# Allegro board SF2-MC-STARTERKIT_REVB_14-0761_PCB_1017.brd
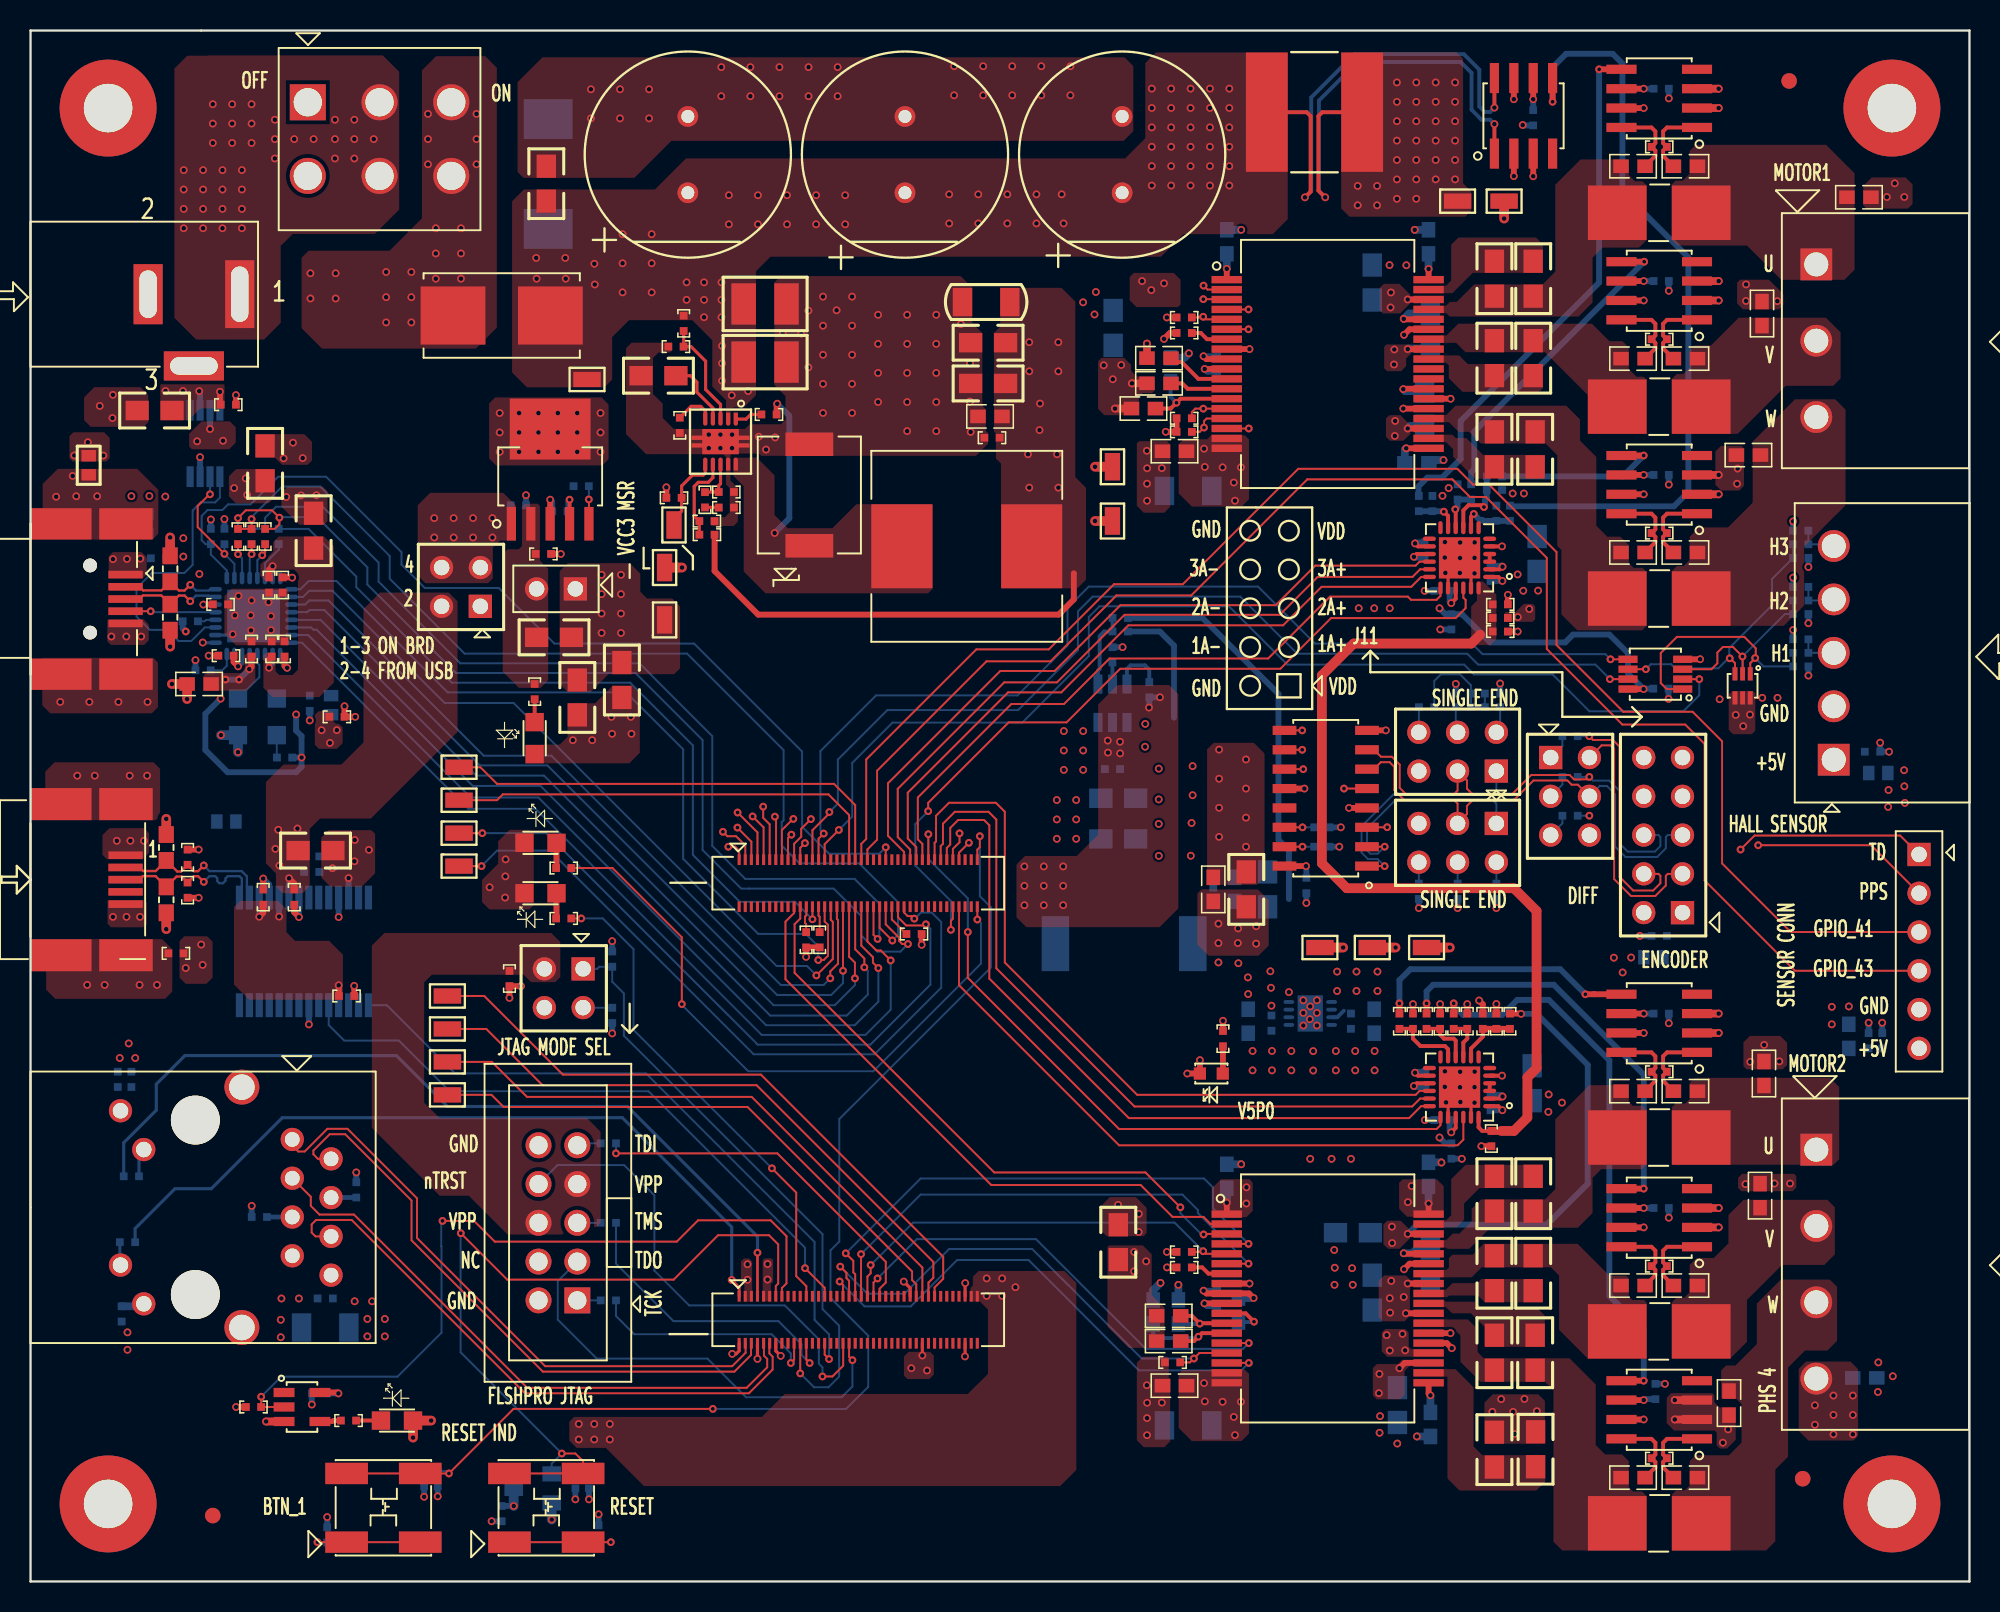
[diagram p0: board, top side]
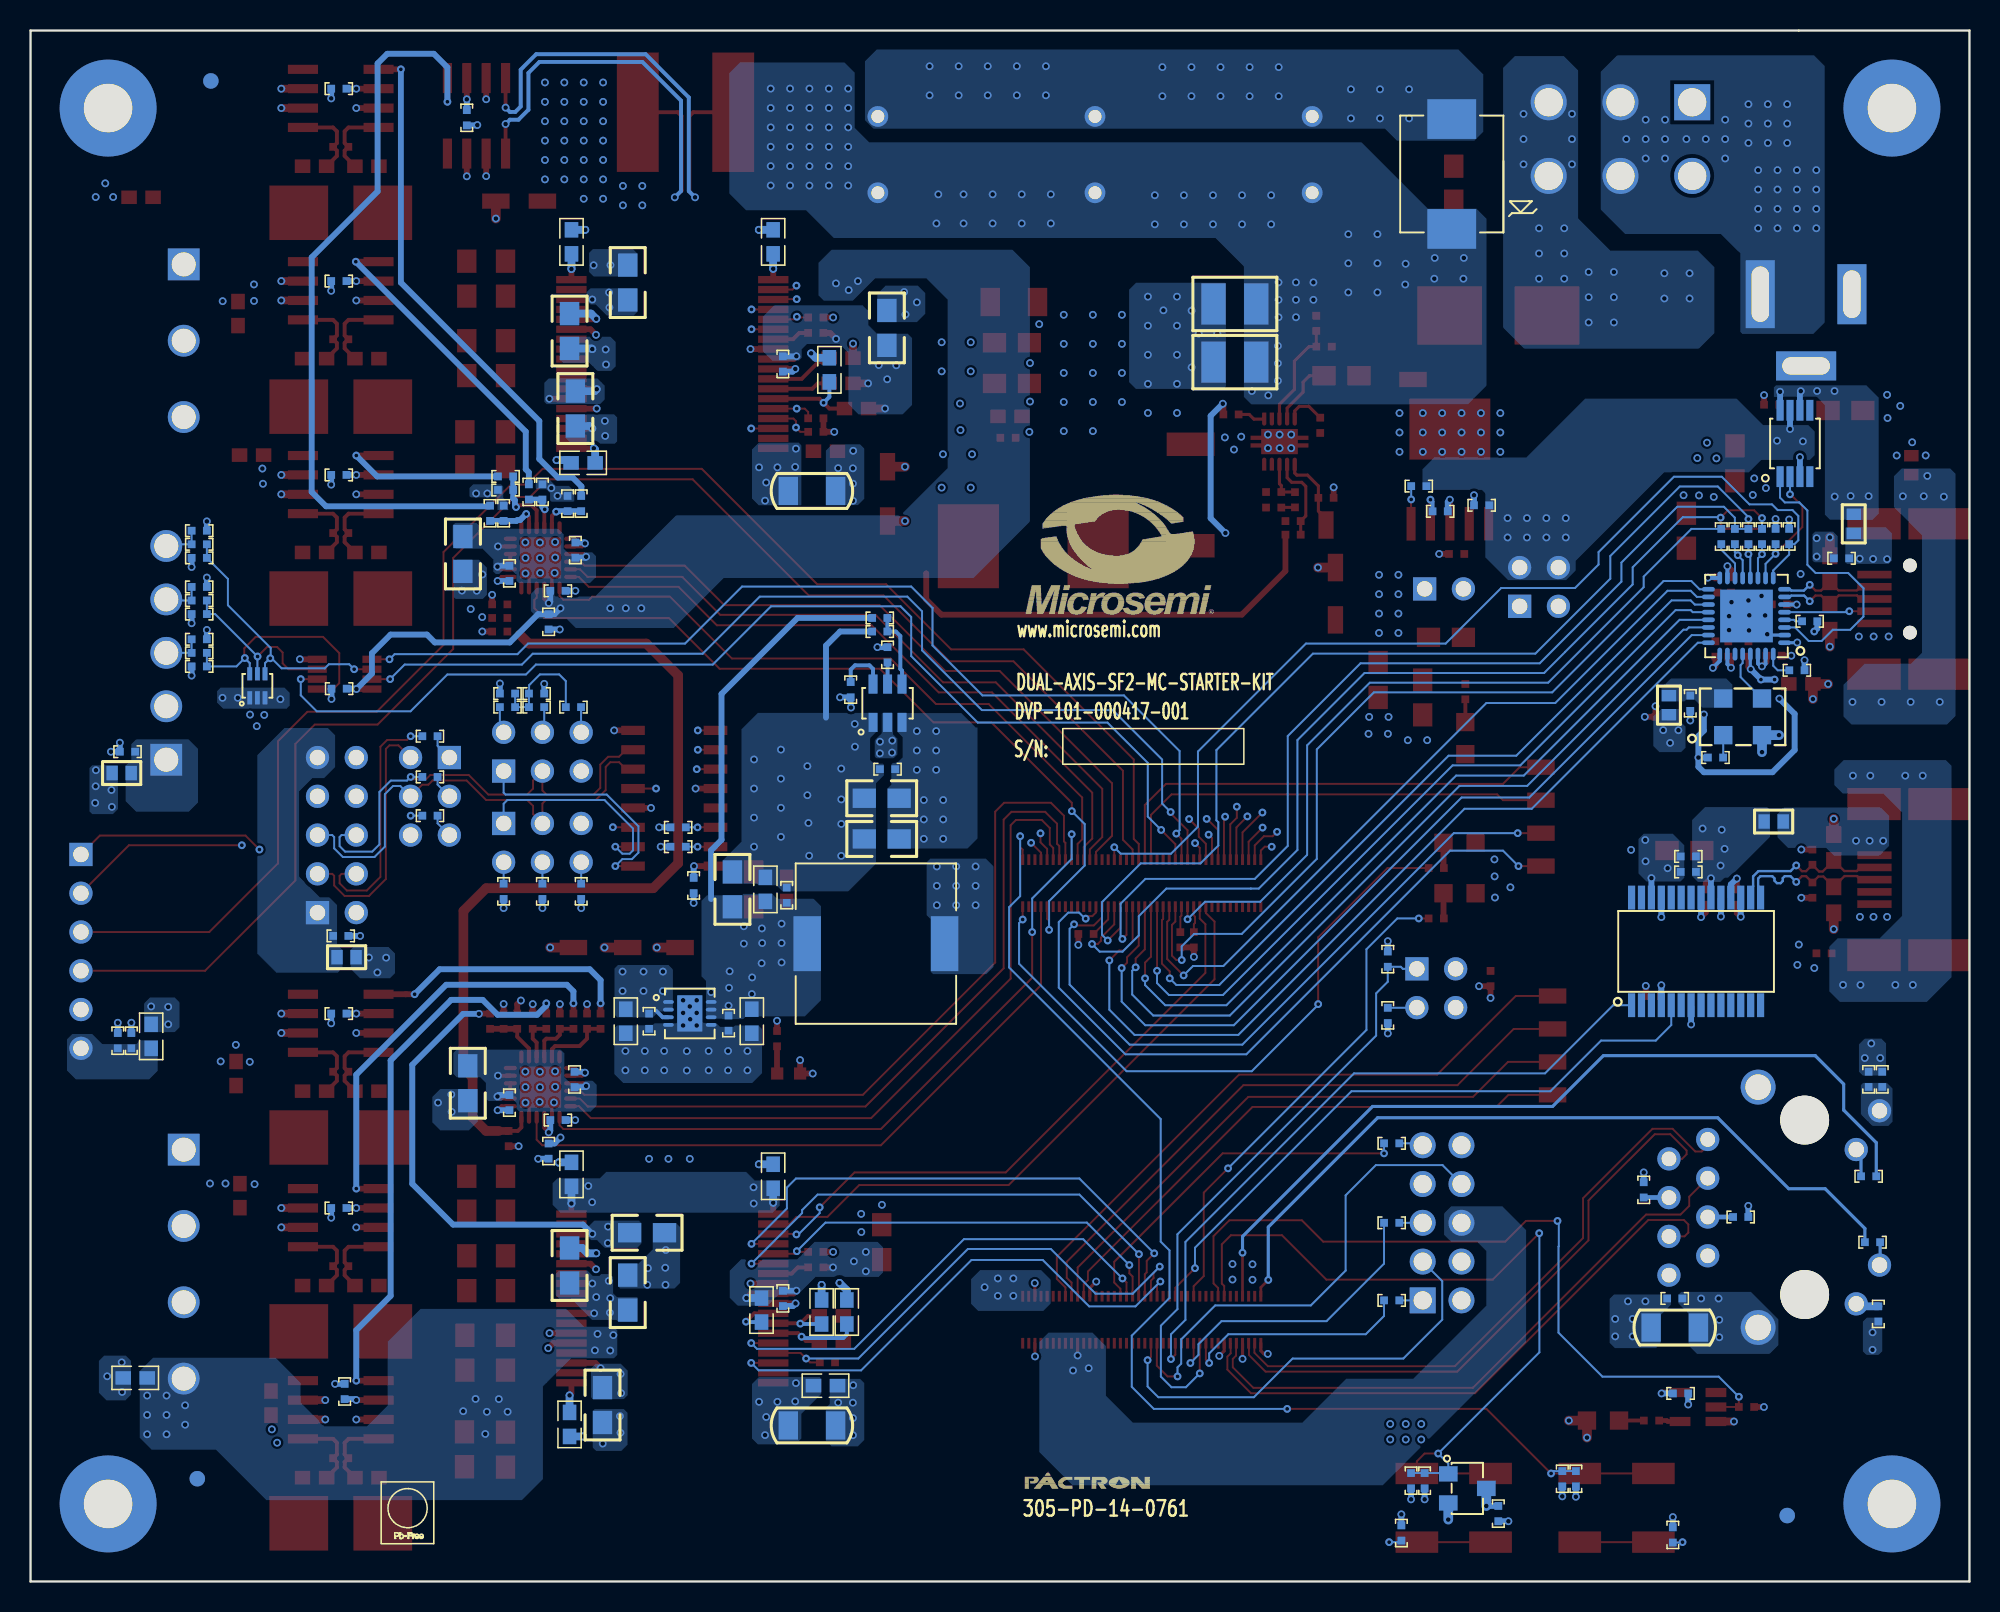
[diagram p1: board, bottom side, seen from below]

Outline 127 x 101.6 mm; copper layers: TOP, GND1, SIGNAL, POWER, GND2, BOTTOM. Coordinates in mm from the lower left corner of the outline.
Outline path: 0,101.6 127,101.6 127,0 0,0 0,101.6

## Design rules (mm)
net group DIFFPAIR0: nets USB_OTG_N USB_OTG_P
net group DIFFPAIR1: nets USB_N USB_P
net group DIFFPAIR2: nets TD_N TD_P
net group DIFFPAIR3: nets RD_N RD_P
net group DIFFPAIR4: nets DRV1_SENSE_UM DRV1_SENSE_UP
net group DIFFPAIR5: nets DRV1_SENSE_VM DRV1_SENSE_VP
net group DIFFPAIR6: nets DRV1_SENSE_WM DRV1_SENSE_WP
net group DIFFPAIR7: nets DRV2_SENSE_UM DRV2_SENSE_UP
net group DIFFPAIR8: nets DRV2_SENSE_VM DRV2_SENSE_VP
net group DIFFPAIR9: nets DRV2_SENSE_WM DRV2_SENSE_WP
net group DIFFPAIR10: nets N16778669 N16779373
net group DIFFPAIR11: nets N16778667 N16778717
net group DIFFPAIR12: nets N16778665 N16779236
nets with their own width: min track width 0.203; nets GND V2P5 VJTAG_VPP
nets with their own width: min track width 0.254; nets AGND1 AGND2 AGND_ADC1 AGND_ADC2 C_GND N01112 N04540 N04995 N16967791 N16971446 N16971530 N16971682 V3P3 V5P0 V12P0 VCC1V8 VCC3 VCC3V3OUT VCC5 VCCUSB VIN_SUPPLY VS_ALL VS_MOTOR

## Placement (name value [footprint] x y rotation side)
C2  0.1uF/25V  [C0402]  48.37 76.45 0 top
C3  0.1uF/25V  [C0402]  62.97 74.92 0 top
C4  1uF/25V  [C0603]  62.85 76.32 180 top
C5  4.7uF/25V  [C0805]  62.72 78.48 180 top
C6  10uF/25V  [C0805]  62.72 81.15 180 top
C7  2.2uF_100V  [C1210]  48.12 83.69 180 bottom
C8  2.2uF_100V  [C1210]  48.12 83.69 180 top
C9  2.2uF_100V  [C1210]  48.12 79.88 180 top
C10  2.2uF_100V  [C1210]  48.12 79.88 180 bottom
C11  47uF_25V  [C1206]  62.59 83.81 0 top
C12  0.01uF_100V  [C0805]  41.13 78.99 0 top
C13  5.6pF_25V  [C0402]  45.58 71.37 180 top
C14  2700pF_50V  [C0402]  45.58 70.35 180 top
C15  10uF/25V  [C0805]  71.25 51.31 0 bottom
C16  10uF/25V  [C0805]  71.25 48.64 0 bottom
C17  0.1uF/25V  [C0402]  70.87 53.21 180 bottom
C18  10uF/16V  [C0603]  78.87 45.34 270 bottom
C19  0.1uF/25V  [C0402]  73.28 58.42 270 bottom
C20  22uF/16V  [C0805]  79.63 45.34 90 top
C21  22uF/16V  [C0805]  81.03 45.34 90 bottom
C22  10uF/16V  [C0603]  77.47 45.34 270 top
C23  0.1uF/25V  [C0402]  77.47 44.96 270 bottom
C24  10uF/16V  [C0603]  79.76 36.7 90 bottom
C25  0.1uF/16V  [C0402]  81.28 36.58 90 bottom
C26  10uF/16V  [C0603]  88.01 36.7 90 bottom
C27  0.1uF/16V  [C0402]  86.49 36.7 90 bottom
C28  330uF/63V  [12P5MM_THT_EEU]  43.05 93.47 180 top
C29  330uF/63V  [12P5MM_THT_EEU]  57.28 93.47 180 top
C30  47uF_25V  [C1206]  75.82 71.44 0 bottom
C31  330uF/63V  [12P5MM_THT_EEU]  71.5 93.47 180 top
C32  0.01uF_100V  [C0805]  33.78 91.57 270 top
C34  0.1uF/100V  [C0805]  87.88 85.09 90 bottom
C35  0.1uF/100V  [C0805]  95.89 85.34 270 top
C36  0.1uF/100V  [C0805]  98.42 85.34 270 top
C37  1uF/25V  [C0603]  74.93 74.04 0 top
C39  470pF/100V  [C0603]  112.52 73.79 0 top
C40  470pF/100V  [C0603]  113.41 83.06 270 top
C41  470pF/100V  [C0603]  119.76 90.68 180 top
C42  0.1uF/100V  [C0805]  91.69 81.91 90 bottom
C43  0.1uF/16V  [C0402]  77.72 79.76 270 bottom
C44  0.1uF/100V  [C0805]  95.89 80.14 90 top
C45  0.1uF/100V  [C0805]  98.42 80.14 90 top
C46  1uF/25V  [C0603]  90.81 73.28 0 bottom
C47  0.1uF/100V  [C0805]  91.31 76.83 90 bottom
C48  0.1uF/100V  [C0805]  95.89 74.17 90 top
C49  0.1uF/100V  [C0805]  98.55 74.17 90 top
C50  1uF/25V  [C0603]  74.93 12.83 0 bottom
C51  47uF_25V  [C1206]  75.82 10.22 0 bottom
C56  0.1uF/100V  [C0805]  86.62 22.84 180 bottom
C57  0.1uF/100V  [C0805]  95.89 25.4 270 top
C58  0.1uF/100V  [C0805]  98.42 25.4 270 top
C59  1uF/25V  [C0603]  91.57 26.67 270 bottom
C60  1uF/25V  [C0603]  78.36 26.54 270 bottom
C61  470pF/100V  [C0603]  111.25 11.68 90 top
C62  470pF/100V  [C0603]  113.28 25.27 270 top
C63  470pF/100V  [C0603]  113.54 33.27 270 top
C64  0.1uF/16V  [C0402]  77.72 18.54 270 bottom
C65  0.1uF/100V  [C0805]  91.69 20.7 90 bottom
C66  0.1uF/100V  [C0805]  95.89 20.19 90 top
C67  0.1uF/100V  [C0805]  98.42 20.19 90 top
C68  1uF/25V  [C0603]  91.69 10.29 90 bottom
C69  0.1uF/100V  [C0805]  89.53 11.56 270 bottom
C70  0.1uF/100V  [C0805]  95.89 14.99 270 top
C71  0.1uF/100V  [C0805]  98.55 14.99 270 top
C72  0.1uF/16V  [C0402]  98.42 95.88 90 bottom
C73  2.2uF/16V  [C0402]  91.31 67.56 90 bottom
C74  0.1uF/16V  [C0402]  106.81 97.79 180 bottom
C75  0.1uF/16V  [C0402]  95.63 66.04 270 bottom
C76  0.1uF/16V  [C0402]  93.07 62.87 90 bottom
C77  1uF/16V  [C0402]  92.46 64.9 180 bottom
C78  0.1uF/16V  [C0402]  91.37 32.89 90 bottom
C79  0.1uF/16V  [C0402]  106.81 85.19 180 bottom
C80  2.2uF/16V  [C0402]  95.63 31.37 270 bottom
C81  0.1uF/16V  [C0402]  106.81 72.49 180 bottom
C82  0.1uF/16V  [C0402]  92.46 30.23 0 bottom
C83  100nF/50V  [C0402]  95.12 36.7 90 top
C84  1uF/16V  [C0402]  93.07 28.19 270 bottom
C85  100nF/50V  [C0402]  106.81 37.2 0 bottom
C86  1uF/16V  [C0402]  121.29 35.42 270 bottom
C90  100nF/50V  [C0402]  106.81 24.47 0 bottom
C92  100nF/50V  [C0402]  106.43 12.45 90 bottom
C94  100pF/50V  [C0402]  120.65 54.36 180 bottom
C96  100pF/50V  [C0402]  115.95 59.94 180 bottom
C97  100pF/50V  [C0402]  115.95 63.37 180 bottom
C98  100pF/50V  [C0402]  115.95 67.06 180 bottom
C99  0.1uF/25V  [C0402]  106.79 58.49 180 bottom
C105  0.1uF/25V  [C0402]  106.68 42.29 180 bottom
C108  100nF/50V  [C0402]  83.57 45.59 90 bottom
C109  0.1uF/16V  [C0402]  20.7 38.35 0 top
C110  0.01uF/25V  [C0402]  15.24 44.83 90 top
C111  0.01uF/25V  [C0402]  17.27 44.83 270 top
C113  22uF/16V  [C0805]  18.67 47.88 0 top
C114  0.1uF/16V  [C0402]  18.41 47.5 0 bottom
C115  0.1uF/16V  [C0402]  21.34 25.65 270 bottom
C116  47pF  [C0402]  10.29 47.45 90 top
C117  47pF  [C0402]  10.29 45.29 270 top
C118  0.1uF/16V  [C0402]  14.99 23.88 0 bottom
C119  0.01uF/25V  [C0402]  9.53 41.15 0 top
C120  0.1uF/16V  [C0402]  5.97 17.53 270 bottom
C121  0.1uF/16V  [C0402]  5.71 32.89 90 bottom
C122  0.1uF/16V  [C0402]  6.6 32.89 90 bottom
C123  1000pF/50V  [C0402]  19.3 18.54 0 bottom
C124  0.1uF/16V  [C0402]  8.38 67.03 0 bottom
C125  0.1uF/16V  [C0402]  12.95 77.09 0 top
C126  22uF/16V  [C0805]  8.13 76.71 180 top
C127  10uF/16V  [C0805]  15.36 73.25 90 top
C128  0.1uF/16V  [C0402]  16.64 61.09 90 top
C129  0.1uF/16V  [C0402]  12.45 64.01 0 top
C130  0.1uF/16V  [C0402]  16.51 65.28 270 top
C131  0.1uF/16V  [C0402]  12.8 60.65 180 top
C132  10uF/16V  [C0805]  18.54 68.83 90 top
C133  0.1uF/16V  [C0402]  15.8 61.09 90 top
C134  0.1uF/16V  [C0402]  15.62 65.28 270 top
C135  4.7uF/16V  [C0603]  11.04 58.79 180 top
C136  0.1uF/16V  [C0402]  14.48 61.09 90 top
C137  0.1uF/16V  [C0402]  20.07 56.64 0 top
C138  0.1uF/16V  [C0402]  18.29 57.53 270 bottom
C139  0.1uF/16V  [C0402]  31.95 70.5 0 bottom
C140  22uF/16V  [C0805]  38.73 59.05 270 top
C141  22uF/16V  [C0805]  35.81 57.91 270 top
C142  0.01uF/25V  [C0402]  34.67 70.1 180 bottom
C143  1uF/16V  [C0402]  33.59 67.31 180 top
C144  0.1uF/16V_NL  [C0402]  18.92 12.32 180 bottom
C145  0.01uF/25V  [C0402]  36.58 6.6 270 bottom
C146  0.1uF/16V_NL  [C0402]  30.86 4.45 270 bottom
C147  0.01uF/25V  [C0402]  26.67 6.73 270 bottom
C148  0.1uF/25V  [C0402]  120.4 35.42 270 bottom
C149  100nF/50V  [C0402]  95.68 29.01 270 top
C150  100nF/50V  [C0402]  96.27 62.23 0 top
C151  0.1uF/16V  [C0402]  18.41 46.48 0 bottom
C152  1uF/25V  [C0603]  78.36 87.76 90 bottom
C153  1uF/25V  [C0603]  91.57 87.76 90 bottom
C154  470pF/100V  [C0603]  120.14 13.34 180 bottom
C155  0.1uF/100V  [C0805]  87.88 18.92 90 bottom
C156  1uF/25V  [C0603]  74.93 12.83 0 top
C157  0.1uF/100V  [C0805]  95.89 8.64 90 top
C158  0.1uF/100V  [C0805]  98.58 8.66 90 top
C160  0.01uF/25V  [C0402]  95.89 71.5 0 bottom
C161  0.01uF/25V  [C0402]  91.82 70.61 90 bottom
C162  0.01uF/25V  [C0402]  96.01 69.98 90 bottom
C163  0.01uF/25V  [C0402]  93.47 71.37 90 bottom
C164  0.01uF/25V  [C0402]  90.55 36.7 90 top
C165  0.01uF/25V  [C0402]  94.11 36.7 90 top
C166  0.01uF/25V  [C0402]  92.33 36.7 90 top
D1  SMBJ51A  [DO-214AB]  33.91 92.2 270 bottom
D3  STPS5L60S  [DO-214AB_STPS5]  51.01 71.17 270 top
D4  -  [BAT54VV]  112.14 58.67 180 top
D6  -  [BAT54VV]  112.14 58.67 180 bottom
D8  PGB1010603MR  [D0603]  8.89 44.65 90 top
D9  PGB1010603MR  [D0603]  8.89 48.08 270 top
D10  PGB1010603MR  [D0603]  9.14 63.16 90 top
D11  PGB1010603MR  [D0603]  9.14 66.34 270 top
D12  LED GREEN  [HSMG-C170]  33.02 55.25 270 top
D13  LED GREEN  [HSMG-C170]  33.4 48.39 180 top
D14  LED GREEN  [HSMG-C170]  33.4 45.09 180 top
D16  LED GREEN  [HSMG-C170]  24 10.54 180 top
F1  8A/ Fast  [FUSE_SMD_HLDR_8A_0154008]  30.86 82.93 0 top
GND1  TPAD  [TP_0603]  96.52 90.42 0 top
GND2  TPAD  [TP_0603]  70.87 73.02 270 top
GND3  TPAD  [TP_0603]  87.88 41.53 0 top
GND4  TPAD  [TP_0603]  41.53 66.42 90 top
GPIO1  TPAD  [TP_0603]  27.3 31.88 180 top
GPIO2  TPAD  [TP_0603]  27.3 34.04 180 top
GPIO3  TPAD  [TP_0603]  27.3 36.2 180 top
GPIO4  TPAD  [TP_0603]  27.3 38.35 180 top
GPIO5  TPAD  [TP_0603]  28.07 51.18 0 top
GPIO6  TPAD  [TP_0603]  28.07 53.34 0 top
GPIO7  TPAD  [TP_0603]  28.07 49.02 0 top
GPIO8  TPAD  [TP_0603]  28.07 46.86 0 top
J2  -  [RIA330-03]  116.97 81.28 90 top
J3  -  [RIA330-04]  116.97 28.29 90 top
J4  -  [RIA182-05]  118.11 60.83 90 top
J7  HDR2X3  [HDR2X3_100MIL]  96.01 49.66 180 top
J8  HDR2X3  [HDR2X3_100MIL]  99.57 53.98 270 top
J11  10PIN JUMPER  [HDR2X5]  108.2 43.81 90 top
J12  DC JACK  [PJ-202AH_JACK]  0 84.33 180 top
J13  HDR2X3  [HDR2X3_100MIL_1]  96.01 55.63 180 top
J15  -  [J00-0045NL]  0 24.51 90 top
J16  -  [54819-0572]  0 45.97 0 top
J17  -  [67803-8020]  0 64.36 270 top
J19  HEADER_1x2_100mil  [HEADER_1X2_100MIL]  34.42 65.02 180 top
J20  HEADER 2X5  [HDR_2X5_BOX]  34.54 23.5 90 top
J22  -  [HDR2X2_100MIL]  36.2 40.13 180 top
J23  -  [HDR2X2_100MIL]  29.46 63.88 90 top
J25  CON6  [HDR6X1]  123.7 41.27 270 top
L1  33uH  [12X12MM_MSS1260]  61.32 67.81 0 top
L2  4.7uH  [10X10MM_SRU1048]  71.63 41.78 0 bottom
L9  600R@100MHz/1A  [FB0603]  121.03 52.96 180 bottom
L13  600R@100MHz/1A  [FB0603]  106.3 40.89 0 bottom
L14  BLM18PG121SN1D  [FB0603]  12.83 49.78 180 bottom
L15  BLM18PG121SN1D  [FB0603]  7.58 69.29 270 bottom
L16  BLM18PG121SN1D  [FB0603]  3.81 73.12 270 top
L17  BLM18PG121SN1D  [FB0603]  19.69 57.4 90 bottom
LED1  GRN  [LED0603]  77.34 33.27 180 top
NOREF  -  [unnamed]  11.94 4.32 0 top
NOREF#2  -  [unnamed#2]  5.08 96.52 0 top
NOREF#3  -  [#2]  127 101.6 0 top
NOREF#4  -  [unnamed#2]  121.92 96.52 0 top
NOREF#5  -  [#2]  5.08 5.08 0 top
NOREF#6  -  [#2]  5.08 5.08 0 top
NOREF#7  -  [unnamed#2]  121.92 5.08 0 top
NOREF#8  -  [#2]  127 0 0 top
NOREF#9  -  [#2]  127 101.6 0 top
NOREF#10  -  [unnamed]  5.08 5.08 0 top
NOREF#11  -  [#2]  0 0 0 top
NOREF#12  -  [unnamed]  115.19 98.3 0 top
NOREF#13  -  [#2]  127 0 0 top
NOREF#14  -  [unnamed]  116.08 6.73 0 top
NOREF#15  -  [unnamed]  116.08 6.73 180 bottom
NOREF#16  -  [unnamed]  115.19 98.3 180 bottom
NOREF#17  -  [unnamed]  11.94 4.32 180 bottom
P1  DF40HC(4.0)-80DS-0.4V  [DF40HC-4_0-80DS-0_4V]  54.22 17.14 0 top
P2  DF40HC(4.0)-80DS-0.4V  [DF40HC-4_0-80DS-0_4V]  54.22 45.74 0 top
R2  0.020R/4W  [R2728_WIDE]  84.1 96.25 180 top
R5  332K  [R0402]  42.78 82.42 270 top
R6  140K  [R0402]  44.31 68.57 180 top
R7  56.2K  [R0402]  42.27 80.89 180 top
R8  165K  [R0402]  42.53 75.74 270 top
R9  10K  [R0402]  44.31 69.46 0 top
R10  76.8K  [R0402]  44.18 70.86 270 top
R12  10K  [R0402]  70.87 60.71 90 bottom
R13  274K_1%  [R0402]  71.37 63.12 180 bottom
R14  49.9K  [R0402]  71.37 62.23 0 bottom
R17  0R/0603  [R0603]  104.97 92.71 180 top
R18  10K  [R0402]  75.56 82.8 180 top
R19  10K  [R0402]  75.56 76.2 180 top
R20  10K  [R0402]  75.56 75.31 180 top
R21  0.020R/2W  [R3624]  106.68 89.66 0 top
R22  0R/0603  [R0603]  108.39 92.71 0 top
R23  0R  [R0603]  72.9 76.83 180 top
R24  0R_NL  [R0603]  74.68 79.38 90 bottom
R25  0R  [R0603]  73.91 78.49 180 top
R26  0R  [R0603]  73.91 80.14 180 top
R27  43K_1%  [R0402]  75.56 81.79 180 top
R28  0R/0603  [R0603]  108.39 80.11 0 top
R29  0.020R/2W  [R3624]  106.68 76.96 180 top
R30  0R/0603  [R0603]  104.97 80.11 180 top
R31  1R_0.25W  [R0805]  70.91 82.12 270 bottom
R32  0R/0603  [R0603]  104.97 67.41 180 top
R33  0.020R/2W  [R3624]  106.68 64.39 0 top
R34  0R/0603  [R0603]  108.39 67.41 0 top
R37  0R/0603  [R0603]  104.97 32.12 180 top
R39  10K  [R0402]  75.56 21.59 180 top
R40  10K  [R0402]  74.8 14.35 180 top
R41  0.020R/2W  [R3624]  106.68 29.08 0 top
R42  0R/0603  [R0603]  108.39 32.12 0 top
R43  0R  [R0603]  74.55 15.75 180 top
R44  0R_NL  [R0603]  73.53 17.65 90 bottom
R46  0R  [R0603]  74.55 17.4 180 top
R47  43K_1%  [R0402]  75.56 20.57 180 top
R48  0R/0603  [R0603]  104.97 19.39 180 top
R49  0.020R/2W  [R3624]  106.68 16.38 180 top
R50  0R/0603  [R0603]  108.39 19.39 0 top
R51  1R_0.25W  [R0805]  71.25 22.23 270 top
R52  0R/0603  [R0603]  104.97 6.8 180 top
R53  0.020R/2W  [R3624]  106.68 3.81 0 top
R54  0R/0603  [R0603]  108.39 6.8 0 top
R55  1R_0.25W  [R0805]  98.68 67.31 270 bottom
R56  1K/1%  [R0402]  106.68 93.98 180 top
R58  1R_0.25W  [R0805]  98.36 32.64 270 bottom
R61  1K/1%  [R0402]  106.68 81.38 180 top
R64  1K/1%  [R0402]  106.68 68.68 180 top
R66  15K/1%  [R0402]  96.9 36.7 270 top
R67  1K/1%  [R0402]  96.01 36.7 270 top
R69  1K/1%  [R0402]  106.68 33.39 180 top
R74  1K/1%  [R0402]  106.68 20.66 180 top
R77  1K/1%  [R0402]  106.68 8.07 180 top
R79  4.7K  [R0402]  115.95 61.72 180 bottom
R80  4.7K  [R0402]  115.95 65.15 180 bottom
R81  4.7K  [R0402]  115.95 68.83 180 bottom
R85  220R/1%  [RC0402]  115.95 60.83 180 bottom
R86  220R/1%  [RC0402]  115.95 64.26 180 bottom
R89  220R/1%  [RC0402]  115.95 67.94 180 bottom
R91  470R  [RC0402]  96.01 45.21 270 bottom
R92  470R  [RC0402]  93.47 45.21 270 bottom
R93  470R  [RC0402]  90.93 45.21 270 bottom
R94  120R  [RC0402]  100.84 55.37 0 bottom
R95  120R  [RC0402]  100.84 52.7 0 bottom
R96  120R  [RC0402]  100.84 50.16 0 bottom
R103  47k/1%  [RC0402]  95.76 57.28 0 bottom
R104  47k/1%  [RC0402]  93.85 57.28 180 bottom
R105  47k/1%  [RC0402]  91.44 57.28 180 bottom
R111  3.3K/1%  [RC0402]  93.85 58.17 0 bottom
R112  2.2K/1%  [RC0402]  95.76 58.17 0 bottom
R113  270R  [R0402]  6.6 26.54 0 bottom
R114  270R  [R0402]  6.35 22.23 180 bottom
R115  5.1Meg 0.25W  [R1206]  19.3 16.64 0 bottom
R116  10K  [R0402]  12.7 68.45 270 bottom
R117  820R  [R0402]  10.46 62.9 0 bottom
R118  0R_NL  [R0402]  13.59 68.45 90 bottom
R119  0R  [R0402]  15.37 68.45 90 top
R120  0R_NL  [R0402]  14.48 68.45 90 top
R121  0R  [R0402]  13.59 68.45 90 top
R122  12K  [R0402]  11.3 59.69 0 bottom
R123  0R_NL  [R0402]  15.37 68.45 90 bottom
R124  0R  [R0402]  14.48 68.45 90 bottom
R125  33R  [R0402]  16.26 68.45 90 bottom
R126  10K_NL  [R0402]  11.81 68.45 90 bottom
R127  1K/1%_NL  [R0402]  16.64 53.98 0 bottom
R128  0.16R  [R0805]  34.29 61.85 180 top
R129  10K  [R0402]  36.07 71.75 180 bottom
R130  270R  [R0402]  33.02 58.29 90 top
R131  270R  [R0402]  34.92 46.74 0 top
R132  270R  [R0402]  34.92 43.43 0 top
R134  10K  [R0402]  35.69 6.6 270 bottom
R135  270R  [R0402]  20.83 10.54 180 top
R136  10K_NL  [R0402]  14.61 11.43 0 top
R137  100R  [R0402]  37.21 3.17 270 bottom
R138  100R  [R0402]  19.43 3.05 270 bottom
R139  0R  [R0402]  50.8 42.04 90 top
R140  0R  [R0402]  51.69 42.04 90 top
R141  0R  [R0402]  57.87 42.42 180 top
R142  33R  [R0402]  37.85 18.42 0 bottom
R143  33R  [R0402]  37.85 23.5 0 bottom
R145  33R  [R0402]  37.85 28.7 0 bottom
R149  10K  [R0402]  38.1 40.77 270 bottom
R153  1K/1%  [R0402]  38.1 37.08 270 bottom
R154  10K_NL  [R0402]  31.37 39.5 270 top
R155  1K/1%  [R0402]  96.27 63.12 180 top
R156  1K/1%  [R0402]  96.27 64.01 0 top
R157  10K  [R0402]  25.78 6.73 270 bottom
R158  100K  [R0402]  42.15 70.99 0 top
R159  470R  [RC0402]  78.11 35.56 90 top
R160  0R/0603  [R0603]  119.1 35.71 270 bottom
R162  0R  [R0603]  79.12 17.78 90 bottom
R165  0R_NL  [R0603]  75.18 17.65 270 bottom
R166  0R  [R0402]  84.58 49.4 180 bottom
R167  0R  [R0402]  84.58 48.13 180 bottom
R168  1K/1%  [R0402]  90.93 70.61 90 bottom
R176  1K/1%  [R0402]  94.36 71.37 90 bottom
R177  1K/1%  [R0402]  95.89 72.39 0 bottom
R178  1K/1%  [R0402]  96.9 69.98 90 bottom
R179  1K/1%  [R0402]  89.66 36.7 270 top
R180  1K/1%  [R0402]  93.22 36.7 270 top
R181  1K/1%  [R0402]  91.44 36.7 270 top
SW1  TL3301AF160QJ  [TL3301_SPST]  33.78 4.83 0 top
SW2  TL3301AF160QJ  [TL3301_SPST]  23.11 4.83 0 top
SW3  SW_DPDT  [SW_DPDT_1201]  22.86 94.49 270 top
U1  TPS54160QDRCRQ1  [10SON_TPS54160Q]  45.19 74.67 0 top
U2  TPS562200  [SOT23-6_TPS562200]  70.87 57.53 180 bottom
U3  LT1965EDD-3.3#PBF  [8DFN_LT1965]  83.82 37.21 270 bottom
U4  DRV8332DKDR  [36HSSOP_DRV8332]  84.96 79.76 270 top
U5  DRV8432DKDR  [36HSSOP_DRV8332]  84.96 18.54 270 top
U6  AD8206YRZ  [8SOIC_AD8206YRZ]  97.79 96.01 0 top
U7  AD8206YRZ  [8SOIC_AD8206YRZ]  106.68 97.15 90 top
U9  ADS7950SBRGER  [24-QFN_ADS7950]  93.6 67.06 180 top
U11  AD8206YRZ  [8SOIC_AD8206YRZ]  106.68 84.55 90 top
U12  ADS7950SBRGER  [24-QFN_ADS7950]  93.6 32.38 180 top
U13  AD8206YRZ  [8SOIC_AD8206YRZ]  106.68 71.85 90 top
U15  AD8206YRZ  [8SOIC_AD8206YRZ]  106.68 36.57 90 top
U19  AD8206YRZ  [8SOIC_AD8206YRZ]  106.68 23.83 90 top
U21  AD8206YRZ  [8SOIC_AD8206YRZ]  106.68 11.25 90 top
U23  74LVC3G17  [74LVC3G17_8TSSOP]  106.43 59.44 90 top
U25  -  [AM26LV32ID]  84.84 51.31 90 top
U27  -  [FT232RL]  17.91 41.27 90 bottom
U28  -  [MIC2025-1YMM]  11.43 74.55 180 bottom
U29  -  [USB3300-EZK]  14.61 63.25 0 bottom
U30  -  [TPS73733DCQ]  34.04 72.39 0 top
U31  74LX1G07STR  [SOT23-5_74LX1G07STR]  17.78 11.43 270 top
U32  RT9818C-29GV_NL  [RT9818C-29GV_SOT23-3]  32.89 6.1 270 bottom
UNK12V_PG  TPAD  [TP_0603]  42.15 69.21 90 top
V3P3  TPAD  [TP_0603]  91.44 41.53 0 top
V5P0  TPAD  [TP_0603]  84.45 41.53 0 top
V12P0  TPAD  [TP_0603]  70.87 69.47 270 top
VCC3  TPAD  [TP_0603]  41.53 62.99 90 top
VS_ALL  TPAD  [TP_0603]  36.45 78.74 0 top
VS_MOTOR  TPAD  [TP_0603]  93.47 90.42 0 top
Y1  ASFLMB-24.000MHZ-LC-T  [ASFLMB-24MHZ]  14.86 56.64 180 bottom

## Library data of the parts
C2-C4 C6 C15-C17 C19 C23 C37 C46 C50 C59 C60 C68 C99 C105 C148 C152 C153 C156 = Cap
C5 C20 C21 C34-C36 C42 C44 C45 C47-C49 C56-C58 C65-C67 C69-C71 C77 C84 C86 C110 C111 C113 C116 C117 C119 C123 C126 C127 C132 C135 C140-C143 C145 C147 C155 C157 C158 C160-C166 = CAPACITOR NON-POL
C7-C14 C18 C22 C24-C27 C30 C32 C39-C41 C43 C51 C61-C64 C72-C76 C78-C83 C85 C90 C92 C94 C96-C98 C108 C109 C114 C115 C118 C120-C122 C124 C125 C128-C131 C133 C134 C136-C139 C144 C146 C149-C151 C154 = CAP NP
C28 C29 C31 = CAP
D1 = DIODE ZENER
D3 = DIODE SCHOTTKY13
D4 D6 = DIODE SCHOTTKY
D8-D11 = DIODE BI-DIR TRIG_0
D12-D14 D16 LED1 = LED
F1 = FUSEHOLDER_2
GND1-GND4 GPIO1-GPIO8 UNK12V_PG V3P3 V5P0 V12P0 VCC3 VS_ALL VS_MOTOR = TEST POINT_0
J2 = MOTOR_HEADRE
J3 = MOTOR_HEADER_4PIN
J4 = HDR_0
J7 J8 J13 = HDR5X1_4
J11 = HDR_2
J12 = PHONEJACK_1
J15 = J00-0045NL
J16 = 54819-0572
J17 = 67803-8020
J19 = HEADER_1x2_100mil
J20 = HEADER 5X2
J22 J23 = JUMPER-2X2PIN
J25 = CON6
L1 L2 L9 L13-L17 = INDUCTOR
P1 P2 = DF40HC-4_0-80DS-0_4V
R2 R5-R10 R12-R14 R17-R34 R37 R39-R44 R46-R55 R58 R113-R126 R128-R132 R134-R143 R145 R149 R154-R158 R160 R162 R165-R167 = R
R56 R61 R64 R66 R67 R69 R74 R77 R79-R81 R85 R86 R89 R91-R96 R103-R105 R111 R112 R127 R153 R159 R168 R176-R181 = RESISTOR
SW1 SW2 = TL3301AF160QJ
SW3 = SW DPDT
U1 = TPS54160QDRCRQ1
U2 = TPS562200
U3 = LT1965EDD-3.3#PBF
U4 = DRV8332DKDR
U5 = DRV8432DKDR
U6 U7 U11 U13 U15 U19 U21 = AD8206YRZ
U9 U12 = ADS7950SBRGER
U23 = 74LVC3G17
U25 = AM26LV32ID
U27 = FT232RL
U28 = MIC2025-1YMM
U29 = USB3300-EZK
U30 = TPS73733DCQ
U31 = 74LX1G07STR
U32 = RT9818C-29GV
Y1 = ASDMB-24.000MHZ-LC-T

## Footprints (pads in the part's own frame, mm; a bottom-side part is the same pattern mirrored in y, then rotated)
8DFN_LT1965
  oval 0.25x0.7 smd: 1(-0.75,-1.4) 2(-0.25,-1.4) 3(0.25,-1.4) 4(0.75,-1.4) 5(0.75,1.4) 6(0.25,1.4) 7(-0.25,1.4) 8(-0.75,1.4)
  rect 2.38x1.65 smd: 9(0,0)
8SOIC_AD8206YRZ
  rect 0.6x1.97 smd: 1(-1.905,-2.475) 2(-0.635,-2.475) 3(0.635,-2.475) 4(1.905,-2.475) 5(1.905,2.475) 6(0.635,2.475) 7(-0.635,2.475) 8(-1.905,2.475)
10SON_TPS54160Q
  custom 0.28x0.85 smd: 1(1,1.475) 2(0.5,1.475) 3(0,1.475) 4(-0.5,1.475) 5(-1,1.475) 6(-1,-1.475) 7(-0.5,-1.475) 8(0,-1.475) 9(0.5,-1.475) 10(1,-1.475)
  custom 3.8x1.65 smd: 11(0,0)
10X10MM_SRU1048
  rect 1.8x3.6 smd: 1(-4.5,0) 2(4.5,0)
12P5MM_THT_EEU
  round 1.358 hole 0.85: 1(0,2.5) 2(0,-2.5)
12X12MM_MSS1260
  rect 4x5.5 smd: 1(-4.25,0) 2(4.25,0)
24-QFN_ADS7950
  oval 0.85x0.28 smd: 1(-1.975,1.25) 2(-1.975,0.75) 3(-1.975,0.25) 4(-1.975,-0.25) 5(-1.975,-0.75) 6(-1.975,-1.25) 13(1.975,-1.25) 14(1.975,-0.75) 15(1.975,-0.25) 16(1.975,0.25) 17(1.975,0.75) 18(1.975,1.25)
  oval 0.28x0.85 smd: 7(-1.25,-1.975) 8(-0.75,-1.975) 9(-0.25,-1.975) 10(0.25,-1.975) 11(0.75,-1.975) 12(1.25,-1.975) 19(1.25,1.975) 20(0.75,1.975) 21(0.25,1.975) 22(-0.25,1.975) 23(-0.75,1.975) 24(-1.25,1.975)
  rect 2.7x2.7 smd: 25(0,0)
36HSSOP_DRV8332
  rect 0.48x1.99 smd: 1(-5.525,-6.61) 2(-4.875,-6.61) 3(-4.225,-6.61) 4(-3.575,-6.61) 5(-2.925,-6.61) 6(-2.275,-6.61) 7(-1.625,-6.61) 8(-0.975,-6.61) 9(-0.325,-6.61) 10(0.325,-6.61) 11(0.975,-6.61) 12(1.625,-6.61) 13(2.275,-6.61) 14(2.925,-6.61) 15(3.575,-6.61) 16(4.225,-6.61) 17(4.875,-6.61) 18(5.525,-6.61) 19(5.525,6.61) 20(4.875,6.61) 21(4.225,6.61) 22(3.575,6.61) 23(2.925,6.61) 24(2.275,6.61) 25(1.625,6.61) 26(0.975,6.61) 27(0.325,6.61) 28(-0.325,6.61) 29(-0.975,6.61) 30(-1.625,6.61) 31(-2.275,6.61) 32(-2.925,6.61) 33(-3.575,6.61) 34(-4.225,6.61) 35(-4.875,6.61) 36(-5.525,6.61)
74LVC3G17_8TSSOP
  rect 0.48x1.25 smd: 1(-0.975,-1.79) 2(-0.325,-1.79) 3(0.325,-1.79) 4(0.975,-1.79) 5(0.975,1.79) 6(0.325,1.79) 7(-0.325,1.79) 8(-0.975,1.79)
54819-0572
  rect 2.25x0.5 smd: 1(6.225,1.6) 2(6.225,0.8) 3(6.225,0) 4(6.225,-0.8) 5(6.225,-1.6)
  rect 3.5x2.1 smd: 6(6.25,4.95) 7(6.25,-4.95)
  rect 4x2.1 smd: 8(2,4.95) 9(2,-4.95)
67803-8020
  round 0.9 hole 0.9 unplated: (-2.2,3.9) (2.2,3.9)
  rect 0.5x2.25 smd: 1(-1.6,6.225) 2(-0.8,6.225) 3(0,6.225) 4(0.8,6.225) 5(1.6,6.225)
  rect 2.05x3.5 smd: 6(4.925,6.25) 9(-4.925,6.25)
  rect 2.05x4 smd: 7(4.925,2) 8(-4.925,2)
AM26LV32ID
  rect 0.6x1.55 smd: 1(-4.445,-2.7) 2(-3.175,-2.7) 3(-1.905,-2.7) 4(-0.635,-2.7) 5(0.635,-2.7) 6(1.905,-2.7) 7(3.175,-2.7) 8(4.445,-2.7) 9(4.445,2.7) 10(3.175,2.7) 11(1.905,2.7) 12(0.635,2.7) 13(-0.635,2.7) 14(-1.905,2.7) 15(-3.175,2.7) 16(-4.445,2.7)
ASFLMB-24MHZ
  rect 1.2x1.2 smd: 1(-1.27,-1.2) 2(1.27,-1.2) 3(1.27,1.2) 4(-1.27,1.2)
BAT54VV
  rect 0.318x0.86 smd: 1(-0.5,-0.785) 2(0,-0.785) 3(0.5,-0.785) 4(0.5,0.785) 5(0,0.785) 6(-0.5,0.785)
C0402
  rect 0.508x0.508 smd: 1(-0.5,0) 2(0.5,0)
C0603
  rect 1.016x0.889 smd: 1(-0.787,0) 2(0.787,0)
C0805
  rect 1.524x1.27 smd: 1(-1.143,0) 2(1.143,0)
C1206
  rect 1.27x1.854 smd: 1(-1.549,0) 2(1.549,0)
C1210
  rect 1.6x2.7 smd: 1(-1.4,0) 2(1.4,0)
D0603
  rect 1.1x1 smd: 1(-0.85,0) 2(0.85,0)
DF40HC-4_0-80DS-0_4V
  rect 0.2x0.7 smd: 1(-7.8,1.54) 2(-7.8,-1.54) 3(-7.4,1.54) 4(-7.4,-1.54) 5(-7,1.54) 6(-7,-1.54) 7(-6.6,1.54) 8(-6.6,-1.54) 9(-6.2,1.54) 10(-6.2,-1.54) 11(-5.8,1.54) 12(-5.8,-1.54) 13(-5.4,1.54) 14(-5.4,-1.54) 15(-5,1.54) 16(-5,-1.54) 17(-4.6,1.54) 18(-4.6,-1.54) 19(-4.2,1.54) 20(-4.2,-1.54) 21(-3.8,1.54) 22(-3.8,-1.54) 23(-3.4,1.54) 24(-3.4,-1.54) 25(-3,1.54) 26(-3,-1.54) 27(-2.6,1.54) 28(-2.6,-1.54) 29(-2.2,1.54) 30(-2.2,-1.54) 31(-1.8,1.54) 32(-1.8,-1.54) 33(-1.4,1.54) 34(-1.4,-1.54) 35(-1,1.54) 36(-1,-1.54) 37(-0.6,1.54) 38(-0.6,-1.54) 39(-0.2,1.54) 40(-0.2,-1.54) 41(0.2,1.54) 42(0.2,-1.54) 43(0.6,1.54) 44(0.6,-1.54) 45(1,1.54) 46(1,-1.54) 47(1.4,1.54) 48(1.4,-1.54) 49(1.8,1.54) 50(1.8,-1.54) 51(2.2,1.54) 52(2.2,-1.54) 53(2.6,1.54) 54(2.6,-1.54) 55(3,1.54) 56(3,-1.54) 57(3.4,1.54) 58(3.4,-1.54) 59(3.8,1.54) 60(3.8,-1.54) 61(4.2,1.54) 62(4.2,-1.54) 63(4.6,1.54) 64(4.6,-1.54) 65(5,1.54) 66(5,-1.54) 67(5.4,1.54) 68(5.4,-1.54) 69(5.8,1.54) 70(5.8,-1.54) 71(6.2,1.54) 72(6.2,-1.54) 73(6.6,1.54) 74(6.6,-1.54) 75(7,1.54) 76(7,-1.54) 77(7.4,1.54) 78(7.4,-1.54) 79(7.8,1.54) 80(7.8,-1.54)
DO-214AB
  rect 2.6x3.2 smd: 1(-3.6,0) 2(3.6,0)
DO-214AB_STPS5
  rect 1.54x3.14 smd: 1(-3.325,0) 2(3.325,0)
FB0603
  rect 0.75x0.95 smd: 1(-0.625,0) 2(0.625,0)
FT232RL
  rect 1.56x0.47 smd: 1(-3.525,4.225) 2(-3.525,3.575) 3(-3.525,2.925) 4(-3.525,2.275) 5(-3.525,1.625) 6(-3.525,0.975) 7(-3.525,0.325) 8(-3.525,-0.325) 9(-3.525,-0.975) 10(-3.525,-1.625) 11(-3.525,-2.275) 12(-3.525,-2.925) 13(-3.525,-3.575) 14(-3.525,-4.225) 15(3.525,-4.225) 16(3.525,-3.575) 17(3.525,-2.925) 18(3.525,-2.275) 19(3.525,-1.625) 20(3.525,-0.975) 21(3.525,-0.325) 22(3.525,0.325) 23(3.525,0.975) 24(3.525,1.625) 25(3.525,2.275) 26(3.525,2.925) 27(3.525,3.575) 28(3.525,4.225)
FUSE_SMD_HLDR_8A_0154008
  rect 4.242x3.81 smd: 1(-3.188,0) 2(3.188,0)
HDR2X2_100MIL
  rect 1.524x1.524 hole 1.016: 1(0,0)
  round 1.524 hole 1.016: 2(0,2.54) 3(2.54,0) 4(2.54,2.54)
HDR2X3_100MIL
  rect 1.524x1.524 hole 1.016: 1(0,0)
  round 1.524 hole 1.016: 2(0,2.54) 3(2.54,0) 4(2.54,2.54) 5(5.08,0) 6(5.08,2.54)
HDR2X3_100MIL_1
  rect 1.524x1.524 hole 1.016: 1(0,2.54)
  round 1.524 hole 1.016: 2(0,0) 3(2.54,2.54) 4(2.54,0) 5(5.08,2.54) 6(5.08,0)
HDR2X5
  rect 1.524x1.524 hole 1.016: 1(0,0)
  round 1.524 hole 1.016: 2(0,2.54) 3(2.54,0) 4(2.54,2.54) 5(5.08,0) 6(5.08,2.54) 7(7.62,0) 8(7.62,2.54) 9(10.16,0) 10(10.16,2.54)
HDR6X1
  rect 1.524x1.524 hole 1.016: 1(-6.35,0)
  round 1.524 hole 1.016: 2(-3.81,0) 3(-1.27,0) 4(1.27,0) 5(3.81,0) 6(6.35,0)
HDR_2X5_BOX
  rect 1.702x1.702 hole 1.194: 1(-5.08,-1.27)
  round 1.702 hole 1.194: 2(-5.08,1.27) 3(-2.54,-1.27) 4(-2.54,1.27) 5(0,-1.27) 6(0,1.27) 7(2.54,-1.27) 8(2.54,1.27) 9(5.08,-1.27) 10(5.08,1.27)
HEADER_1X2_100MIL
  rect 1.524x1.524 hole 1.016: 1(-1.27,0)
  round 1.524 hole 1.016: 2(1.27,0)
HSMG-C170
  rect 1.2x1.2 smd: 1(-1.05,0) 2(1.05,0)
J00-0045NL
  round 3.2 hole 3.2 unplated: (-5.715,-10.795) (5.715,-10.795)
  round 1.524 hole 0.965: 1(4.445,-17.145) 2(3.175,-19.685) 3(1.905,-17.145) 4(0.635,-19.685) 5(-0.635,-17.145) 6(-1.905,-19.685) 7(-3.175,-17.145) 8(-4.445,-19.685)
  round 1.524 hole 1.016: 9(6.325,-5.893) 10(3.785,-7.417) 11(-3.785,-5.893) 12(-6.325,-7.417)
  round 2.286 hole 1.676: 13(7.874,-13.843) 14(-7.874,-13.843)
LED0603
  rect 0.8x0.8 smd: A(-0.75,0) C(0.75,0)
MIC2025-1YMM
  rect 0.47x1.36 smd: 1(-0.975,-2.175) 2(-0.325,-2.175) 3(0.325,-2.175) 4(0.975,-2.175) 5(0.975,2.175) 6(0.325,2.175) 7(-0.325,2.175) 8(-0.975,2.175)
PJ-202AH_JACK
  rect 1.905x4.445 hole 1.143x3.632: 1(-13.7,0)
  rect 1.905x3.937 hole 1.143x3.124: 2(-7.7,0)
  rect 3.937x1.905 hole 3.124x1.143: 3(-10.7,4.7)
R0402
  rect 0.508x0.508 smd: 1(-0.5,0) 2(0.5,0)
R0603
  rect 1.016x0.889 smd: 1(-0.787,0) 2(0.787,0)
R0805
  rect 1.524x1.27 smd: 1(-1.143,0) 2(1.143,0)
R1206
  rect 1.27x1.854 smd: 1(-1.549,0) 2(1.549,0)
R2728_WIDE
  rect 2.743x7.823 smd: 1(-3.124,0) 2(3.124,0)
R3624
  rect 3.85x3.57 smd: 1(-2.75,0) 2(2.75,0)
RC0402
  rect 0.508x0.508 smd: 1(-0.5,0) 2(0.5,0)
RIA182-05
  rect 2.083x2.083 hole 1.575: 1(-7,0)
  round 2.083 hole 1.575: 2(-3.5,0) 3(0,0) 4(3.5,0) 5(7,0)
RIA330-03
  rect 2.083x2.083 hole 1.575: 1(5,0)
  round 2.083 hole 1.575: 2(0,0) 3(-5,0)
RIA330-04
  rect 2.083x2.083 hole 1.575: 1(0,0)
  round 2.083 hole 1.575: 2(-5,0) 3(-10,0) 4(-15,0)
RT9818C-29GV_SOT23-3
  rect 1x1.22 smd: 1(-0.953,-1.245) 2(0.953,-1.245) 3(0,1.245)
SOT23-5_74LX1G07STR
  rect 0.6x1.36 smd: 1(-0.95,-1.175) 2(0,-1.175) 3(0.95,-1.175) 4(0.95,1.175) 5(-0.95,1.175)
SOT23-6_TPS562200
  rect 0.59x1.25 smd: 1(-0.95,-1.255) 2(0,-1.255) 3(0.95,-1.255) 4(0.95,1.255) 5(0,1.255) 6(-0.95,1.255)
SW_DPDT_1201
  rect 2.362x2.362 hole 1.854: 1(-2.413,-4.699)
  round 2.362 hole 1.854: 2(-2.413,0) 3(-2.413,4.699) 4(2.413,-4.699) 5(2.413,0) 6(2.413,4.699)
TL3301_SPST
  rect 2.795x1.4 smd: 1(-2.412,-2.25) 2(2.412,-2.25) 3(-2.412,2.25) 4(2.412,2.25)
TP_0603
  rect 1.8x1 smd: 1(0,0)
TPS73733DCQ
  rect 0.6x2.2 smd: 1(-2.54,-3.1) 2(-1.27,-3.1) 3(0,-3.1) 4(1.27,-3.1) 5(2.54,-3.1)
  rect 5.3x4 smd: 6(0,3.1)
unnamed
  round 1.016 smd: (0,0)
unnamed#2
  round 6.35 hole 3.175 unplated: (0,0)
USB3300-EZK
  oval 0.84x0.305 smd: 1(-2.495,1.75) 2(-2.495,1.25) 3(-2.495,0.75) 4(-2.495,0.25) 5(-2.495,-0.25) 6(-2.495,-0.75) 7(-2.495,-1.25) 8(-2.495,-1.75) 17(2.495,-1.75) 18(2.495,-1.25) 19(2.495,-0.75) 20(2.495,-0.25) 21(2.495,0.25) 22(2.495,0.75) 23(2.495,1.25) 24(2.495,1.75)
  oval 0.305x0.84 smd: 9(-1.75,-2.495) 10(-1.25,-2.495) 11(-0.75,-2.495) 12(-0.25,-2.495) 13(0.25,-2.495) 14(0.75,-2.495) 15(1.25,-2.495) 16(1.75,-2.495) 25(1.75,2.495) 26(1.25,2.495) 27(0.75,2.495) 28(0.25,2.495) 29(-0.25,2.495) 30(-0.75,2.495) 31(-1.25,2.495) 32(-1.75,2.495)
  rect 3.45x3.45 smd: 33(0,0)

## Nets
AGND1: C43.1 R23.2 R25.2 R27.2 R31.2 U4.9(AGND)
AGND2: C64.1 R43.2 R46.2 R47.2 R51.2 R162.2 U5.9(AGND)
AGND_ADC1: C73.1 C75.1 R55.1 U9.2(AGND1) U9.5(AINM) U9.15(AGND2)
AGND_ADC2: C78.1 C80.1 R58.1 U12.2(AGND1) U12.5(AINM) U12.15(AGND2)
GND: C3.1 C4.2 C5.2 C6.2 C7.1 C8.1 C9.1 C10.1 C11.1 C12.1 C13.1 C14.1 C15.2 C16.2 C17.1 C18.1 C20.2 C21.2 C22.1 C23.1 C24.1 C25.1 C26.1 C27.1 C28.2 C29.2 C30.1 C31.2 C32.1 C34.2 C37.1 C39.1 C40.1 C41.1 C42.2 C46.2 C47.2 C50.1 C51.1 C56.2 C59.1 C60.1 C61.1 C62.1 C63.1 C65.2 C68.1 C69.2 C72.1 C74.1 C76.1 C77.2 C79.1 C81.1 C82.1 C83.2 C84.2 C85.2 C86.1 C90.2 C92.2 C94.1 C96.1 C97.1 C98.1 C99.1 C105.2 C108.1 C109.2 C110.2 C111.2 C113.2 C114.2 C115.1 C116.2 C117.2 C118.1 C119.2 C120.2 C121.2 C122.2 C123.2 C124.2 C125.2 C126.2 C127.2 C128.2 C129.2 C130.2 C131.2 C132.2 C133.2 C134.2 C135.2 C136.2 C137.2 C138.2 C139.2 C140.2 C141.2 C142.2 C143.1 C144.2 C145.2 C146.2 C147.2 C148.1 C149.2 C150.2 C151.2 C152.2 C153.2 C154.1 C155.2 C156.1 C160.2 C161.2 C162.2 C163.2 C164.2 C165.2 C166.2 D1.1(ANODE) D3.1(ANODE) D6.1(ANODE1) D6.2(ANODE2) D6.3(ANODE3) D8.1 D9.1 D10.1 D11.1 D12.2(CATHODE) D13.2(CATHODE) D14.2(CATHODE) GND1.1(PAD) GND2.1(PAD) GND3.1(PAD) GND4.1(PAD) J4.2(GND) J11.2 J11.10 J12.2 J12.3 J16.5(GND) J17.5(GND) J20.2 J20.10 J25.5 L16.1 LED1.C(CATHODE) P1.2 P1.3 P1.5 P1.8 P1.9 P1.11 P1.14 P1.57 P1.75 P1.76 R7.2 R8.2 R9.2 R14.2 R18.2 R19.2 R20.2 R31.1 R39.2 R40.2 R51.1 R55.2 R58.2 R67.1 R112.2 R115.2 R122.1 R127.2 R136.1 R137.1 R138.1 R139.1 R140.1 R141.1 R153.2 R154.2 R156.2 R166.1 U1.9(GND) U1.11(EPAD) U2.1(GND) U3.4(GND1) U3.5(GND2) U3.9(EPAD) U4.8(GND_8) U4.23(GND_C) U4.24(GND_24) U4.25(GND_25) U4.31(GND_B) U4.32(GND_A) U5.8(GND_8) U5.23(GND_D) U5.24(GND_C) U5.31(GND_B) U5.32(GND_A) U6.2(GND) U6.3(VREF2) U7.2(GND) U7.3(VREF2) U9.20(BDGND) U9.23(REFM) U9.25(E-PAD) U11.2(GND) U11.3(VREF2) U12.20(BDGND) U12.23(REFM) U12.25(E-PAD) U13.2(GND) U13.3(VREF2) U15.2(GND) U15.3(VREF2) U19.2(GND) U19.3(VREF2) U21.2(GND) U21.3(VREF2) U23.4(GND) U25.8(GND) U25.12(G\) U27.7(GND1) U27.18(GND2) U27.21(GND3) U27.25(AGND) U27.26(TEST) U28.3(GND) U29.1(GND_1) U29.2(GND_2) U29.33(PAD) U30.3(GND1) U30.6(GND2) U31.3(GND) U32.2(GND) Y1.2(GND)
V2P5: C149.1 C150.1 R155.2 R156.1 U9.24(REFP) U12.24(REFP)
V3P3: C26.2 C27.2 C76.2 C77.1 C82.2 C84.1 C99.2 C108.2 R167.1 U3.1(OUT1) U3.2(OUT2) U3.3(SENSE) U9.21(+VBD) U12.21(+VBD) U23.8(VCC) U25.4(G) U25.16(VCC) V3P3.1(PAD)
V5P0: C18.2 C20.1 C21.1 C22.2 C23.2 C24.2 C25.2 C72.2 C73.2 C74.2 C75.2 C78.2 C79.2 C80.2 C81.2 C85.1 C90.1 C92.1 D4.4(CATHODE3) D4.5(CATHODE2) D4.6(CATHODE1) J23.1 L2.2 L9.1 L13.1 R13.1 R79.2 R80.2 R81.2 R91.2 R92.2 R93.2 R111.1 R155.1 R159.2 R160.1 U3.6(SHDN#) U3.7(IN1) U3.8(IN2) U6.6(V+) U6.7(VREF1) U7.6(V+) U7.7(VREF1) U9.1(+VA1) U9.14(+VA2) U11.6(V+) U11.7(VREF1) U12.1(+VA1) U12.14(+VA2) U13.6(V+) U13.7(VREF1) U15.6(V+) U15.7(VREF1) U19.6(V+) U19.7(VREF1) U21.6(V+) U21.7(VREF1) V5P0.1(PAD)
V12P0: C3.2 C4.1 C5.1 C6.1 C11.2 C15.1 C16.1 C17.2 C30.2 C37.2 C46.1 C50.2 C51.2 C59.2 C60.2 C68.2 C152.1 C153.1 C156.2 L1.2 R6.1 R12.2 R158.1 U2.3(VIN) U4.1(GVDD_B) U4.17(VDD) U4.18(GVDD_C1) U4.19(GVDD_C2) U4.36(GVDD_A) U5.1(GVDD_B) U5.17(VDD) U5.18(GVDD_C) U5.19(GVDD_D) U5.36(GVDD_A) V12P0.1(PAD)
VCC1V8: C132.1 C133.1 C134.1 U29.15(VDD1.8_1) U29.26(VDD1.8_2)
VCC3: C120.1 C121.1 C122.1 C127.1 C128.1 C129.1 C130.1 C131.1 C137.1 C140.1 C141.1 C144.1 C146.1 D16.1(ANODE) J15.9(LED1A) J15.12(LED2A) J19.1 J22.4 L17.1 P1.77 P1.79 R116.1 R126.2 R128.1 R134.2 R149.1 R157.2 U29.6(VDD3.3_1) U29.16(VDD3.3_2) U29.25(VDD3.3_3) U29.30(VDD3.3_4) U29.31(REG_EN) U31.5(VCC) U32.3(VCC) VCC3.1(PAD)
VCC3V3OUT: C109.1 C110.1 U27.4(VCCIO) U27.17(3V3OUT) U27.19(R\E\S\E\T)
VCC5: C139.1 J23.3 J23.4 R129.2 U28.7(VIN) U30.1(VIN)
VCCUSB: C111.1 C113.1 C114.1 C151.1 J23.2 L14.1 U27.20(VCC)
VIN_SUPPLY: J12.1 SW3.2(COMMON1) SW3.5(COMMON2)
ADC1_GPIO0/H_L_ALR: P2.72 U9.22(GPIO0/H_L_ALR)
ADC2_GPIO0/H_L_ALR: P2.74 U12.22(GPIO0/H_L_ALR)
C_GND: C123.1 J15.8(CHS GND) J15.13(CASE1) J15.14(CASE2) R115.1
DRV1_FLT#: P2.11 U4.3(FAULT#_IPU_VREG)
DRV1_OTW#: P2.9 U4.2(OTW#_IPU_VREG)
DRV1_PWM_A: P2.7 U4.4(PWM_A)
DRV1_PWM_B: P2.17 U4.6(PWM_B)
DRV1_PWM_C: P2.15 U4.16(PWM_C)
DRV1_RST#_A: P2.13 R18.1 U4.5(RESET_A#)
DRV1_RST#_B: P2.21 R19.1 U4.14(RESET_B#)
DRV1_RST#_C: P2.19 R20.1 U4.15(RESET_C#)
DRV1_SENSE_UM: R22.1 R56.1 U7.1(-IN)
DRV1_SENSE_UP: R17.1 R56.2 U7.8(+IN)
DRV1_SENSE_VM: R28.1 R61.1 U11.1(-IN)
DRV1_SENSE_VP: R30.1 R61.2 U11.8(+IN)
DRV1_SENSE_WM: R34.1 R64.1 U13.1(-IN)
DRV1_SENSE_WP: R32.1 R64.2 U13.8(+IN)
DRV2_FLT#: P2.22 U5.3(FAULT#_IPU_VREG)
DRV2_OTW#: P2.20 U5.2(OTW#_IPU_VREG)
DRV2_PWM_A: P1.39 U5.4(PWM_A)
DRV2_PWM_B: P1.41 U5.6(PWM_B)
DRV2_PWM_C: P1.45 U5.14(PWM_C)
DRV2_PWM_D: P1.35 U5.16(PWM_D)
DRV2_RST#_AB: P1.43 R39.1 U5.5(RESET_AB#)
DRV2_RST#_CD: P1.37 R40.1 U5.15(RESET_CD#)
DRV2_SENSE_UM: R42.1 R69.1 U15.1(-IN)
DRV2_SENSE_UP: R37.1 R69.2 U15.8(+IN)
DRV2_SENSE_VM: R50.1 R74.1 U19.1(-IN)
DRV2_SENSE_VP: R48.1 R74.2 U19.8(+IN)
DRV2_SENSE_WM: R54.1 R77.1 U21.1(-IN)
DRV2_SENSE_WP: R52.1 R77.2 U21.8(+IN)
ENC_A_MTR1: P2.1 U25.3(1Y)
ENC_B_MTR1: P2.3 U25.5(2Y)
ENC_N_MTR1: P2.5 U25.11(3Y)
GPIO_24: P2.24 R139.2
GPIO_26_ULPI_CLKOUT: P2.26 R125.2
GPIO_28: P2.28 R140.2
GPIO_30_ULPI_D7: P2.30 U29.17(DATA7)
GPIO_32_ULPI_D6: P2.32 U29.18(DATA6)
GPIO_34_ULPI_D5: P2.34 U29.19(DATA5)
GPIO_36_ULPI_D4: P2.36 U29.20(DATA4)
GPIO_38_ULPI_D3: P2.38 U29.21(DATA3)
GPIO_40_ULPI_D2: P2.40 U29.22(DATA2)
GPIO_41: J25.3 P2.41
GPIO_42_ULPI_D1: P2.42 U29.23(DATA1)
GPIO_43: J25.4 P2.43
GPIO_44_ULPI_D0: P2.44 U29.24(DATA0)
GPIO_46_STP_DIR: P2.46 R123.2 R124.2
GPIO_48_DIR_NXT: P2.48 R120.2 R121.2
GPIO_49_ULPI_RST#: P2.49 R126.1 U29.9(RESET)
GPIO_50_NXT_STP: P2.50 R118.2 R119.2
GPIO_52: P2.52 R141.2
GPIO_79: C147.1 P2.79 R157.1 SW2.3 SW2.4
GPIO_80: P2.80 R131.2
GPIO_88: P1.23 R132.2
HALL_U_MTR1: P2.25 U23.7(1Y)
HALL_V_MTR1: P2.27 U23.5(2Y)
HALL_W_MTR1: P2.29 U23.2(3Y)
JTAG_NTRST: J20.8 P1.36
JTAG_TCK: P1.20 R142.2
JTAG_TDI: P1.47 R145.2
JTAG_TDO: J20.3 P1.38
JTAG_TMS: P1.24 R143.2
JTAGSEL: J22.1 P1.22 R149.2
LED_ACT: P1.1 R114.1
LED_SPD: P1.7 R113.1
MODE1: R43.1 R44.1 U5.13(M1)
MODE2: R46.1 R165.2 U5.12(M2)
MODE3: R162.1 U5.11(M3)
NRESET_IN: C145.1 P1.13 R134.1 SW1.3 SW1.4 U32.1(R\E\S\E\T)
NRESET_OUT: P1.15 R136.2 U31.2(A)
OSC_EN: R127.1 Y1.1(OE)
PPS: J25.2 P2.73
RD_N: J15.6(RD-) P1.12
RD_P: J15.3(RD+) P1.10
REF_CLK_24_MHZ: U29.28(XI) Y1.3(OUT)
SPI0_ADC2_CLK: P2.67 U12.17(SCLK)
SPI0_ADC2_CS#: P2.65 U12.16(CS#)
SPI0_ADC2_DI: P2.69 U12.18(SDI)
SPI0_ADC2_DO: P2.63 U12.19(SDO)
SPI1_ADC1_CS#: P2.55 U9.16(CS#)
SPI1_ADC1_RES_CLK: P2.57 U9.17(SCLK)
SPI1_ADC1_RES_DI: P2.59 U9.18(SDI)
SPI1_ADC1_RES_DO: P2.61 U9.19(SDO)
TD: J25.1 P2.71
TD_N: J15.2(TD-) P1.6
TD_P: J15.1(TD+) P1.4
UART_0_RXD: P1.30 U27.1(TXD)
UART_0_TXD: P1.29 U27.5(RXD)
ULPI_DIR: R120.1 R124.1 U29.12(DIR)
ULPI_NXT: R118.1 R121.1 U29.11(NXT)
ULPI_STP: R119.1 R123.1 U29.13(STP)
USB_N: C116.1 D9.2 J16.2(DM) U27.16(USBDM)
USB_OTG_ID: J17.4(ID) U29.5(ID)
USB_OTG_N: D11.2 J17.2(DM) U29.8(DM)
USB_OTG_P: D10.2 J17.3(DP) U29.7(DP)
USB_OTG_VBUS: C125.1 C126.1 L15.1 R117.1 U28.6(VOUT2) U28.8(VOUT1)
USB_P: C117.1 D8.2 J16.3(DP) U27.15(USBDP)
VJTAG_VPP: J20.6 J20.7 J22.3 P1.62 R154.1
VREG: C64.2 R44.2 R165.1 U5.10(VREG)
VS_ALL: C7.2 C8.2 C9.2 C10.2 C28.1 C29.1 C31.1 C32.2 D1.2(CATHODE) F1.2 R2.2 R5.1 U1.2(VIN) U6.8(+IN) VS_ALL.1(PAD)
VS_MOTOR: C34.1 C42.1 C47.1 C56.1 C65.1 C69.1 C155.1 R2.1 R66.1 U4.21(PVDD_C) U4.29(PVDD_B) U4.34(PVDD_A) U5.21(PVDD_D) U5.26(PVDD_C) U5.29(PVDD_B) U5.34(PVDD_A) U6.1(-IN) VS_MOTOR.1(PAD)
N00157: C119.1 J16.6(SH1) J16.7(SH2) J16.8(SH3) J16.9(SH4)
N00555: J16.1(VBUS) L14.2
N01112: R168.2 U7.5(OUT)
N04259: J17.6(SH1) J17.7(SH2) J17.8(SH3) J17.9(SH4) L16.2
N04466: C124.1 J17.1(VBUS) L15.2
N04540: R176.2 U11.5(OUT)
N04995: R177.2 U13.5(OUT)
N06144: C163.1 R176.1 U9.10(CH1)
N06168: C160.1 R177.1 U9.9(CH2)
N06183: U28.1(EN) U29.3(CPEN)
N06201: R116.2 U28.2(FLG) U29.10(EXTVBUS)
N06295: R117.2 U29.4(VBUS)
N09205: R122.2 U29.32(RBIAS)
N09786: C135.1 C136.1 U29.29(VDDA1.8)
N12712: C138.1 L17.2 Y1.4(VCC)
N16848: C115.2 J15.4(CT_1)
N18079: C118.2 J15.5(CT_2)
N18538: J15.10(LED1C) R113.2
N18715: J15.11(LED2C) R114.2
N28469: R129.1 U30.5(EN)
N28825: C143.2 J19.2 R128.2 R130.2 U30.2(VOUT)
N28978: C142.1 U30.4(NR)
N29399: D12.1(ANODE) R130.1
N34017: R137.2 SW1.1 SW1.2
N35376: R138.2 SW2.1 SW2.2
N36903: D13.1(ANODE) R131.1
N37434: D14.1(ANODE) R132.1
N37800: R135.2 U31.4(Y)
N37836: D16.2(CATHODE) R135.1
N49885: J20.1 R142.1
N49936: J20.5 R143.1
N49986: J20.9 R145.1
N16774855: C94.2 J4.1(+5V) L9.2
N16775624: J4.3(H1) R79.1 R85.1
N16775652: J4.4(H2) R80.1 R86.1
N16775664: J4.5(H3) R81.1 R89.1
N16776051: C96.2 D4.1(ANODE1) D6.6(CATHODE1) R85.2 U23.1(1A)
N16776063: C97.2 D4.2(ANODE2) D6.5(CATHODE2) R86.2 U23.3(2A)
N16776075: C98.2 D4.3(ANODE3) D6.4(CATHODE3) R89.2 U23.6(3A)
N16778665: J11.4 J13.1 R94.2 U25.1(1\B\)
N16778667: J11.6 J13.3 R95.2 U25.7(2\B\)
N16778669: J11.8 J13.5 R96.2 U25.9(3\B\)
N16778687: C105.1 J11.1 J11.9 L13.2
N16778717: J7.3 J8.4 J11.5 U25.6(2A)
N16779236: J7.1 J8.2 J11.3 U25.2(1A)
N16779373: J7.5 J8.6 J11.7 U25.10(3A)
N16780321: J7.2 R91.1
N16780409: J7.4 R92.1
N16780429: J7.6 R93.1
N16780867: J13.2 R103.2
N16780887: J13.4 R104.2
N16780907: J13.6 R105.2
N16780910: R103.1 R104.1 R105.1 R111.2 R112.1
N16783802: J8.3 R95.1
N16783803: J8.5 R96.1
N16783804: J8.1 R94.1
N16871306: R5.2 R7.1 U1.3(EN)
N16871416: C12.2 U1.4(SS/TR)
N16871471: R8.1 U1.5(RT/CLK)
N16871584: C2.1 U1.1(BOOT)
N16871593: C2.2 D3.2(CATHODE) L1.1 U1.10(PH)
N16871769: C13.2 R10.1 U1.8(COMP)
N16871820: C14.2 R10.2
N16871955: R6.2 R9.1 U1.7(VSENSE)
N16936440: C43.2 R24.2 R26.2 U4.10(VREG)
N16936471: R23.1 R24.1 U4.13(M1)
N16936533: R26.1 U4.11(M3)
N16936558: R27.1 U4.7(OC_ADJ)
N16936568: R25.1 U4.12(M2)
N16943286: C48.1 C49.1 U4.20(BST_C)
N16943621: C48.2 C49.2 R32.2 R33.1 U4.22(OUT_C)
N16943743: C44.1 C45.1 U4.28(BST_B)
N16943755: C44.2 C45.2 R29.2 R30.2 U4.30(OUT_B)
N16943831: C35.1 C36.1 U4.35(BST_A)
N16943843: C35.2 C36.2 R17.2 R21.1 U4.33(OUT_A)
N16946416: C41.2 J2.1 R21.2 R22.2
N16946456: C39.2 J2.3 R33.2 R34.2
N16946462: C40.2 J2.2 R28.2 R29.1
N16967547: C83.1 R66.2 R67.2 U12.8(CH3)
N16967791: R178.2 U6.5(OUT)
N16971446: R181.1 U19.5(OUT)
N16971530: R180.1 U21.5(OUT)
N16971616: C166.1 R181.2 U12.10(CH1)
N16971620: C165.1 R180.2 U12.9(CH2)
N16971682: R179.1 U15.5(OUT)
N16988521: C19.1 U2.6(VBST)
N16988523: C19.2 L2.1 U2.2(SW)
N16988564: R13.2 R14.1 U2.4(VFB)
N16988618: R12.1 U2.5(EN)
N17104519: C66.1 C67.1 U5.28(BST_B)
N17104521: C62.2 J3.2 R49.1 R50.2
N17104523: C66.2 C67.2 R48.2 R49.2 U5.30(OUT_B)
N17104549: C57.1 C58.1 U5.35(BST_A)
N17104551: C57.2 C58.2 R37.2 R41.1 U5.33(OUT_A)
N17104785: C63.2 J3.1 R41.2 R42.2
N17104821: C61.2 J3.3 R53.2 R54.2
N17104853: C70.1 C71.1 U5.27(BST_C)
N17104905: C70.2 C71.2 R52.2 R53.1 U5.25(OUT_C)
N17105083: R47.1 U5.7(OC_ADJ)
N17133546: F1.1 SW3.3(NO1) SW3.6(NO2)
N17147959: GPIO1.1(PAD) P1.59
N17147966: GPIO2.1(PAD) P1.61
N17147973: GPIO3.1(PAD) P1.63
N17147980: GPIO4.1(PAD) P1.65
N17154994: U9.3(MXO) U9.4(AINP)
N17160841: C162.1 R178.1 U9.8(CH3)
N17164921: U12.3(MXO) U12.4(AINP)
N17170958: GPIO5.1(PAD) P2.37
N17170960: GPIO6.1(PAD) P2.39
N17239278: J22.2 R153.1
N17323792: LED1.A(ANODE) R159.1
N17323873: R158.2 U1.6(PWRGD) UNK12V_PG.1
N17344975: C154.2 C157.2 C158.2 J3.4 U5.22(OUT_D)
N17345293: C157.1 C158.1 U5.20(BST_D)
N17380955: R166.2 U25.14(4A)
N17381023: R167.2 U25.15(4\B\)
N17385439: C161.1 R168.1 U9.11(CH0)
N17385782: C164.1 R179.2 U12.11(CH0)
N17398330: GPIO7.1(PAD) P2.54
N17398332: GPIO8.1(PAD) P2.56
N17398872: C86.2 C148.2 J25.6 R160.2
N1685252226: R125.1 U29.14(CLKOUT)

Pads without a net: J15 7; J16 4; J20 4; P1 16 17 18 19 21 25 26 27 28 31 32 33 34 40 42 44 46 48 49 50 51 52 53 54 55 56 58 60 64 66 67 68 69 70 71 72 73 74 78 80; P2 2 4 6 8 10 12 14 16 18 23 31 33 35 45 47 51 53 58 60 62 64 66 68 70 75 76 77 78; SW3 1 4; U4 26 27; U6 4; U7 4; U9 6 7 12 13; U11 4; U12 6 7 12 13; U13 4; U15 4; U19 4; U21 4; U25 13; U27 2 3 6 8 9 10 11 12 13 14 22 23 24 27 28; U28 4 5; U29 27; U31 1

## Via types
v1: diameter 0.508, hole 0.254, TOP to BOTTOM, 139 vias
v2: diameter 0.508, hole 0.305, TOP to BOTTOM, 864 vias

## Routing (per net, layer and track width the routed paths; a pad name or vN(x,y) marks a point on that pad's centre or on a via; arc(x,y) is an arc through that point)
AGND1: length 5.5
  TOP w0.381: U4.9 77.02,80.08 v2(76.83,80.26) ; R27.2 74.63,81.79 v2(74.24,81.4)
  TOP w0.508: R25.2 v2(72.14,78.49) ; R23.2 v2(71.03,76.83)
  BOTTOM w0.381: C43.1 76.84,80.26 v2(76.83,80.26)
  vias: v2(70.29,79.67) v2(70.89,78.76) v2(71.44,79.69)
AGND2: length 6
  TOP w0.381: v2(76.83,19.05) 77.02,18.87 U5.9 79.81,18.87 v2(80.11,18.57) ; R47.2 v2(74.44,20.57)
  BOTTOM w0.381: C64.1 76.84,19.04 v2(76.83,19.05)
  BOTTOM w0.508: R162.2 v2(80.11,18.57)
  vias: v2(72.29,21.59) v2(72.29,20.32) v2(73.07,20.97)
AGND_ADC1: length 4.4
  TOP w0.254: U9.5 v2(96.38,67.81) ; v2(90.61,67.13) 90.79,67.31 U9.15 ; v2(96.42,66.48) 96.24,66.31 U9.2
  BOTTOM w0.381: v2(96.42,66.48) 96.36,66.54 C75.1 ; v2(90.61,67.13) 90.67,67.06 C73.1
AGND_ADC2: length 4.5
  TOP w0.254: U12.5 v2(96.38,33.13) ; v2(96.42,31.77) 96.43,31.77 96.3,31.63 U12.2 ; U12.15 90.79,32.63 v2(90.61,32.46)
  BOTTOM w0.381: v2(96.42,31.77) 96.42,31.77 96.33,31.87 C80.1 ; v2(90.61,32.46) 90.68,32.39 C78.1
GND: length 158.3
  TOP w0.203: P1.8 v2(47.61,14.58) ; v2(49.14,14.78) 48.82,15.1 P1.14 ; v2(92.72,31.38) 92.85,31.25 U12.20 ; 92.8,66.04 92.67,66.17 v2(92.67,66.07) 92.8,66.04 ; 92.8,66.04 92.85,65.99 U9.20 ; P1.76 61.22,14.75 v2(61.21,14.74) ; U9.23 94.35,65.8 v2(94.58,66.04) ; v2(94.58,31.37) 94.35,31.13 U12.23 ; v2(61.22,19.55) 61.22,19.54 P1.75 ; v2(45.96,14.91) 46.22,14.91 46.41,15.11 P1.2 ; P1.57 57.61,19.23 v2(57.2,19.64)
  TOP w0.381: v2(89.94,21.5) 89.98,21.47 U5.32 ; v2(89.94,82.71) 89.98,82.68 U4.32 ; C149.2 v2(95.03,28.51) ; C166.2 v2(92.33,37.82) ; v2(89.92,76.83) 89.92,76.83 U4.23 ; C109.2 v2(21.2,39.02) ; C83.2 95.12,37.82 v2(94.88,38.06) ; v2(74.36,75.31) R20.2 R19.2 ; U23.4 109.35,60.41 v2(109.36,60.41) ; C117.2 v2(11.01,44.79) ; R156.2 v2(96.77,64.63) ; v2(17.58,43.52) 17.27,43.83 C111.2 ; U5.24 v2(93.01,16.27) ; C110.2 v2(15.24,46.05) ; C143.1 v2(34.73,67.31) ; R136.1 v2(13.46,11.43) ; C131.2 v2(11.67,60.65) ; U5.31 90.33,20.82 v2(89.96,20.45) ; U4.8 v2(79.84,80.73) ; v2(50.8,40.92) R139.1 R140.1 ; U25.12 v2(83.44,51.94) ; U5.23 92.76,15.62 v2(93.09,15.28) ; v2(89.96,81.67) 90.33,82.03 U4.31 ; v2(31.37,38.23) R154.2 v2(32.12,39) ; 98.42,93.54 v2(98.42,92.05) ; U25.8 v2(88.77,55.75) ; R39.2 v2(74.43,21.59) ; C116.2 v2(11.01,47.95) ; R141.1 v2(58.37,41.71) ; v2(76.59,34.15) LED1.C v2(75.77,33.27) ; U5.8 v2(79.84,19.52) ; C165.2 v2(94.11,37.82) ; C164.2 v2(90.55,37.82) ; C150.2 v2(97.41,62.23) ; U4.24 93.01,77.48 v2(93.01,77.48) ; U6.2 v2(97.16,92.06) ; R67.1 v2(96.01,37.83) ; v2(21.27,56.64) C137.2 v2(20.57,57.33) ; R18.2 v2(74.43,82.8) ; C125.2 v2(13.45,77.72) ; v2(89.92,78.1) 89.94,78.13 U4.25 ; U30.3 v2(34.04,70.87)
  TOP w0.508: U21.3 v2(107.7,11.88) ; U15.3 v2(110.57,37.2) ; U19.3 v2(110.57,24.47) ; U13.2 v2(110.57,71.22) ; U19.2 v2(110.57,23.2) ; U15.2 v2(110.57,35.93) ; U11.2 v2(110.57,83.92) ; U13.3 v2(110.57,72.49) ; 109.16,96.52 v2(110.57,96.52) ; U31.3 v2(15.43,10.48) ; U11.3 v2(110.57,85.19) ; U7.3 v2(110.57,97.79) ; U21.2 v2(107.7,10.61)
  TOP w0.635: D9.1 v2(8.89,49.96) ; D10.1 v2(9.14,61.24) ; D8.1 v2(8.89,42.73) ; D11.1 v2(9.14,68.39) ; GND1.1 v2(96.52,89.28) ; v2(10.25,57.81) C135.2 v2(9.26,58.79) ; GND3.1 v2(89.41,41.53) ; GND4.1 v2(42.67,66.42) ; GND2.1 v2(69.72,73.02)
  BOTTOM w0.203: U29.2 13.19,62 v2(13.25,62.05) ; U29.1 11.29,61.5 v2(11.28,61.51)
  BOTTOM w0.381: C72.1 97.76,95.39 v2(97.74,95.41) ; C92.2 v2(107.05,12.95) ; C82.1 v2(91.33,30.23) ; C97.1 v2(116.45,62.77) ; C79.1 v2(107.31,84.55) ; C84.2 93.74,27.69 v2(93.75,27.69) ; C96.1 v2(116.45,59.34) ; v2(34.04,70.87) 34.17,70.73 C142.2 ; C81.1 v2(107.31,71.85) ; C90.2 v2(107.31,23.83) ; R137.1 v2(37.21,4.4) ; U27.26 v2(20.83,46.08) ; v2(121.73,54.36) C94.1 v2(121.15,54.95) ; C138.2 v2(18.29,56.4) ; C76.1 v2(92.34,62.37) ; C105.2 v2(105.41,42.29) ; C118.1 v2(14.49,24.6) ; 74.9,56.59 74.9,61.31 73.97,62.23 R14.2 ; C98.1 v2(116.45,66.46) ; v2(17.75,53.98) 17.75,53.37 17.4,53.01 12.91,53.01 11.45,54.47 11.45,56.83 v2(12.45,57.83) ; v2(17.75,53.98) 17.75,55.38 17.4,55.74 v2(17.4,56.8) ; v2(17.75,53.98) R127.2 ; C85.2 v2(107.31,36.57) ; U28.3 v2(11.1,73.65) ; v2(15.24,46.05) 15.63,45.66 U27.18 ; R153.2 v2(38.1,35.9) ; U27.21 v2(17.58,43.52) ; U27.7 v2(18.23,36.49) ; C144.2 v2(18.42,11.59) ; U27.25 v2(20.18,43.52) ; C145.2 v2(36.58,5.38) ; R166.1 v2(85.82,49.4) ; C139.2 v2(32.45,71.16) ; 30.86,3.95 v2(30.2,3.95) ; R112.2 v2(96.26,58.82) ; C115.1 v2(21.34,26.8) ; C147.2 v2(26.67,5.58) ; R138.1 v2(19.43,4.22) ; C86.1 v2(121.29,36.6) ; C108.1 v2(83.57,44.45) ; C77.2 v2(91.31,64.9) ; C148.1 v2(120.4,36.6) ; C99.1 v2(107.29,57.81) ; C74.1 v2(107.31,97.15) ; R122.1 v2(10.8,60.35)
  BOTTOM w0.508: v2(89.94,21.5) 90.51,21.5 90.86,21.84 C65.2 ; v2(89.92,78.1) 90.04,77.98 C47.2 ; C42.2 90.29,83.06 v2(89.94,82.71) ; C46.2 91.77,73.46 v2(92.55,73.46) ; C60.1 v2(79.3,27.33) ; C153.2 v2(90.66,88.54) ; v2(92.41,27.44) 92.4,27.46 C59.1 ; C68.1 v2(90.81,9.5) ; C152.2 v2(79.3,88.54)
  BOTTOM w0.635: v2(13.59,54.33) Y1.2 v2(12.48,55.44) ; U32.2 v2(34.14,4.05)
  vias: v2(2.87,73.76) v2(3.75,74.63) v2(4.53,77.01) v2(4.77,73.76) v2(5.3,61.9) v2(5.39,77.74) v2(5.37,76.22) v2(5.4,43.54) v2(5.84,34.29) v2(6.28,61.9) v2(6.29,43.54) v2(6.35,16.32) v2(6.35,15.18) v2(6.43,35.25) v2(6.86,34.29) v2(7.18,43.54) v2(7.25,61.9) v2(10.01,68.34) v2(10.01,67.14) v2(10.16,40.19) v2(11.06,66) v2(11.18,41.72) v2(11.27,40.39) v2(13.39,63.28) v2(13.62,64.56) v2(14.42,63.29) v2(14.48,64.26) v2(14.44,62.3) v2(15.59,64.15) v2(15.75,63.24) v2(15.75,62.32) v2(16.58,73.57) v2(16.75,71.05) v2(17.19,74.6) v2(17.72,71.15) v2(17.83,73.59) v2(18.73,71.16) v2(19.77,46.72) v2(21.22,47.18) v2(21.23,18.35) v2(21.23,48.57) v2(22.06,17.2) v2(22.06,16.06) v2(22.16,47.93) v2(22.37,18.35) v2(23.21,17.2) v2(23.21,16.06) v2(30.07,45.47) v2(30.73,76.54) v2(30.73,75.27) v2(30.73,74) v2(31.12,47.3) v2(31.1,46.19) v2(31.08,44.8) v2(32,76.54) v2(32,75.27) v2(32,74) v2(33.27,76.54) v2(33.27,75.27) v2(33.27,74) v2(34.54,76.54) v2(34.54,75.27) v2(34.54,74) v2(35.52,55.11) v2(35.81,76.54) v2(35.81,75.27) v2(35.81,74) v2(36.71,97.75) v2(36.71,95.84) v2(36.79,55.11) v2(37.33,76.54) v2(37.33,75.27) v2(37.33,74) v2(38.05,56.64) v2(38.09,55.53) v2(38.61,97.75) v2(38.61,95.84) v2(39.32,56.64) v2(39.36,55.53) v2(40.52,97.75) v2(40.52,95.84) v2(44.42,75.13) v2(44.42,74.24) v2(45.19,75.13) v2(45.19,74.24) v2(45.25,99.2) v2(45.25,97.3) v2(45.95,75.13) v2(45.95,74.24) v2(46.96,20.78) v2(46.96,19.76) v2(47.15,99.2) v2(47.15,97.3) v2(47.7,74.99) v2(48.18,74.15) v2(48.27,20.79) v2(48.27,19.78) v2(48.77,74.95) v2(49.06,99.2) v2(49.06,97.3) v2(49.27,81.76) v2(50.49,81.74) v2(50.96,99.2) v2(50.96,97.3) v2(50.95,83.25) v2(50.95,79.54) v2(51.91,84.17) v2(51.91,82.26) v2(51.91,80.36) v2(51.91,78.45) v2(51.91,76.55) v2(52.8,83.27) v2(52.87,99.2) v2(52.87,97.3) v2(53.81,84.17) v2(53.81,82.26) v2(53.81,80.36) v2(53.81,78.45) v2(53.81,76.55) v2(55.51,82.98) v2(55.51,81.07) v2(55.51,79.17) v2(55.51,77.26) v2(57.42,82.98) v2(57.42,81.07) v2(57.42,79.17) v2(57.42,77.26) v2(57.42,75.36) v2(59.32,82.98) v2(59.32,81.07) v2(59.32,79.17) v2(59.32,77.26) v2(59.32,75.36) v2(60.49,99.26) v2(60.49,97.36) v2(60.93,82.36) v2(61.53,79.82) v2(61.53,77.29) v2(61.58,75.31) v2(62.4,99.26) v2(62.4,97.36) v2(64.3,99.26) v2(64.3,97.36) v2(66.21,99.26) v2(66.21,97.36) v2(68.11,99.26) v2(68.11,97.36) v2(68.94,83.79) v2(69.69,83) v2(69.78,84.47) v2(71.23,24.67) v2(72.59,24.08) v2(72.58,22.89) v2(73.01,56.18) v2(73,54.68) v2(73.12,74.07) v2(73.12,12.85) v2(73.14,72.92) v2(73.13,71.92) v2(73.13,70.79) v2(73.14,11.71) v2(73.13,10.7) v2(73.13,9.58) v2(73.9,53.25) v2(73.9,51.23) v2(73.9,49.63) v2(73.9,47.53) v2(74.1,72.93) v2(74.1,11.72) v2(76,47.54) v2(76.12,53.41) v2(76.12,51.51) v2(76.05,49.69) v2(77.85,54.49) v2(77.85,52.59) v2(77.85,50.68) v2(77.85,48.78) v2(79.61,53.85) v2(79.61,51.94) v2(79.61,50.04) v2(79.61,48.13) v2(80.04,34.75) v2(80.04,33.48) v2(81.31,34.75) v2(81.31,33.48) v2(82.58,34.75) v2(82.58,33.48) v2(83.37,38.07) v2(83.37,37.25) v2(83.37,36.42) v2(83.82,37.67) v2(83.79,36.83) v2(84.02,34.74) v2(84.02,33.47) v2(84.26,38.07) v2(84.26,37.25) v2(84.26,36.42) v2(85.39,21.71) v2(85.43,20.55) v2(85.41,19.43) v2(85.5,34.75) v2(85.5,33.48) v2(86.56,20.52) v2(86.6,19.43) v2(86.77,34.75) v2(86.77,33.48) v2(88.04,34.75) v2(88.04,33.48) v2(88.39,10.83) v2(88.36,9.74) v2(89.01,86.23) v2(89.52,9.03) v2(90.12,86.22) v2(92.48,71.12) v2(92.64,68.09) v2(92.63,67.07) v2(92.64,33.42) v2(92.63,32.4) v2(92.89,71.63) v2(93.62,66.07) v2(93.64,68.06) v2(93.63,67.05) v2(93.64,33.39) v2(93.63,32.37) v2(93.65,31.41) v2(94.59,68.07) v2(94.58,67.05) v2(94.59,33.4) v2(94.58,32.38) v2(97.08,71.27) v2(97.4,65.97) v2(97.82,71.27) v2(97.77,64.9) v2(98.75,64.91) v2(99.42,30.76) v2(99.44,31.9) v2(100.31,31.37) v2(110.63,57.8) v2(110.85,9.09) v2(111.19,9.96) v2(111.82,72.91) v2(111.78,71.91) v2(112.33,26.03) v2(112.37,84.97) v2(112.36,83.89) v2(112.64,34.04) v2(113.43,57.89) v2(113.55,35.15) v2(114.23,26.07) v2(114.42,83.87) v2(114.43,57.89) v2(114.55,34.07) v2(115.25,26.07) v2(121,12.41) v2(121.03,14.35) v2(121.59,90.69) v2(121.98,13.44) v2(122.11,91.59) v2(122.73,90.69)
V2P5: length 57.2
  TOP w0.254: U12.24 94.85,29.75 95.08,29.51 C149.1
  TOP w0.508: 96.33,29.51 C149.1
  TOP w0.635: 96.33,29.51 97.16,29.51 98.04,30.39 98.04,33.02 98.65,33.62 98.65,43.92 97.16,45.42 86.21,45.42 84.58,47.05 84.58,59.36 86.66,61.44 94.37,61.44 94.96,62.03
